# Altium PCB AudioDSP-1.0.PcbDoc
Units mil, origin at the board's own origin, x right, y up, seen from the top; angles counter-clockwise.
Board outline 3935 x 3935 mil, 4 copper layers (Top Layer, MLT, MLB, Bottom Layer), stack 23.756 mil thick; 126 components, 73 nets, 372 pads, 138 vias.
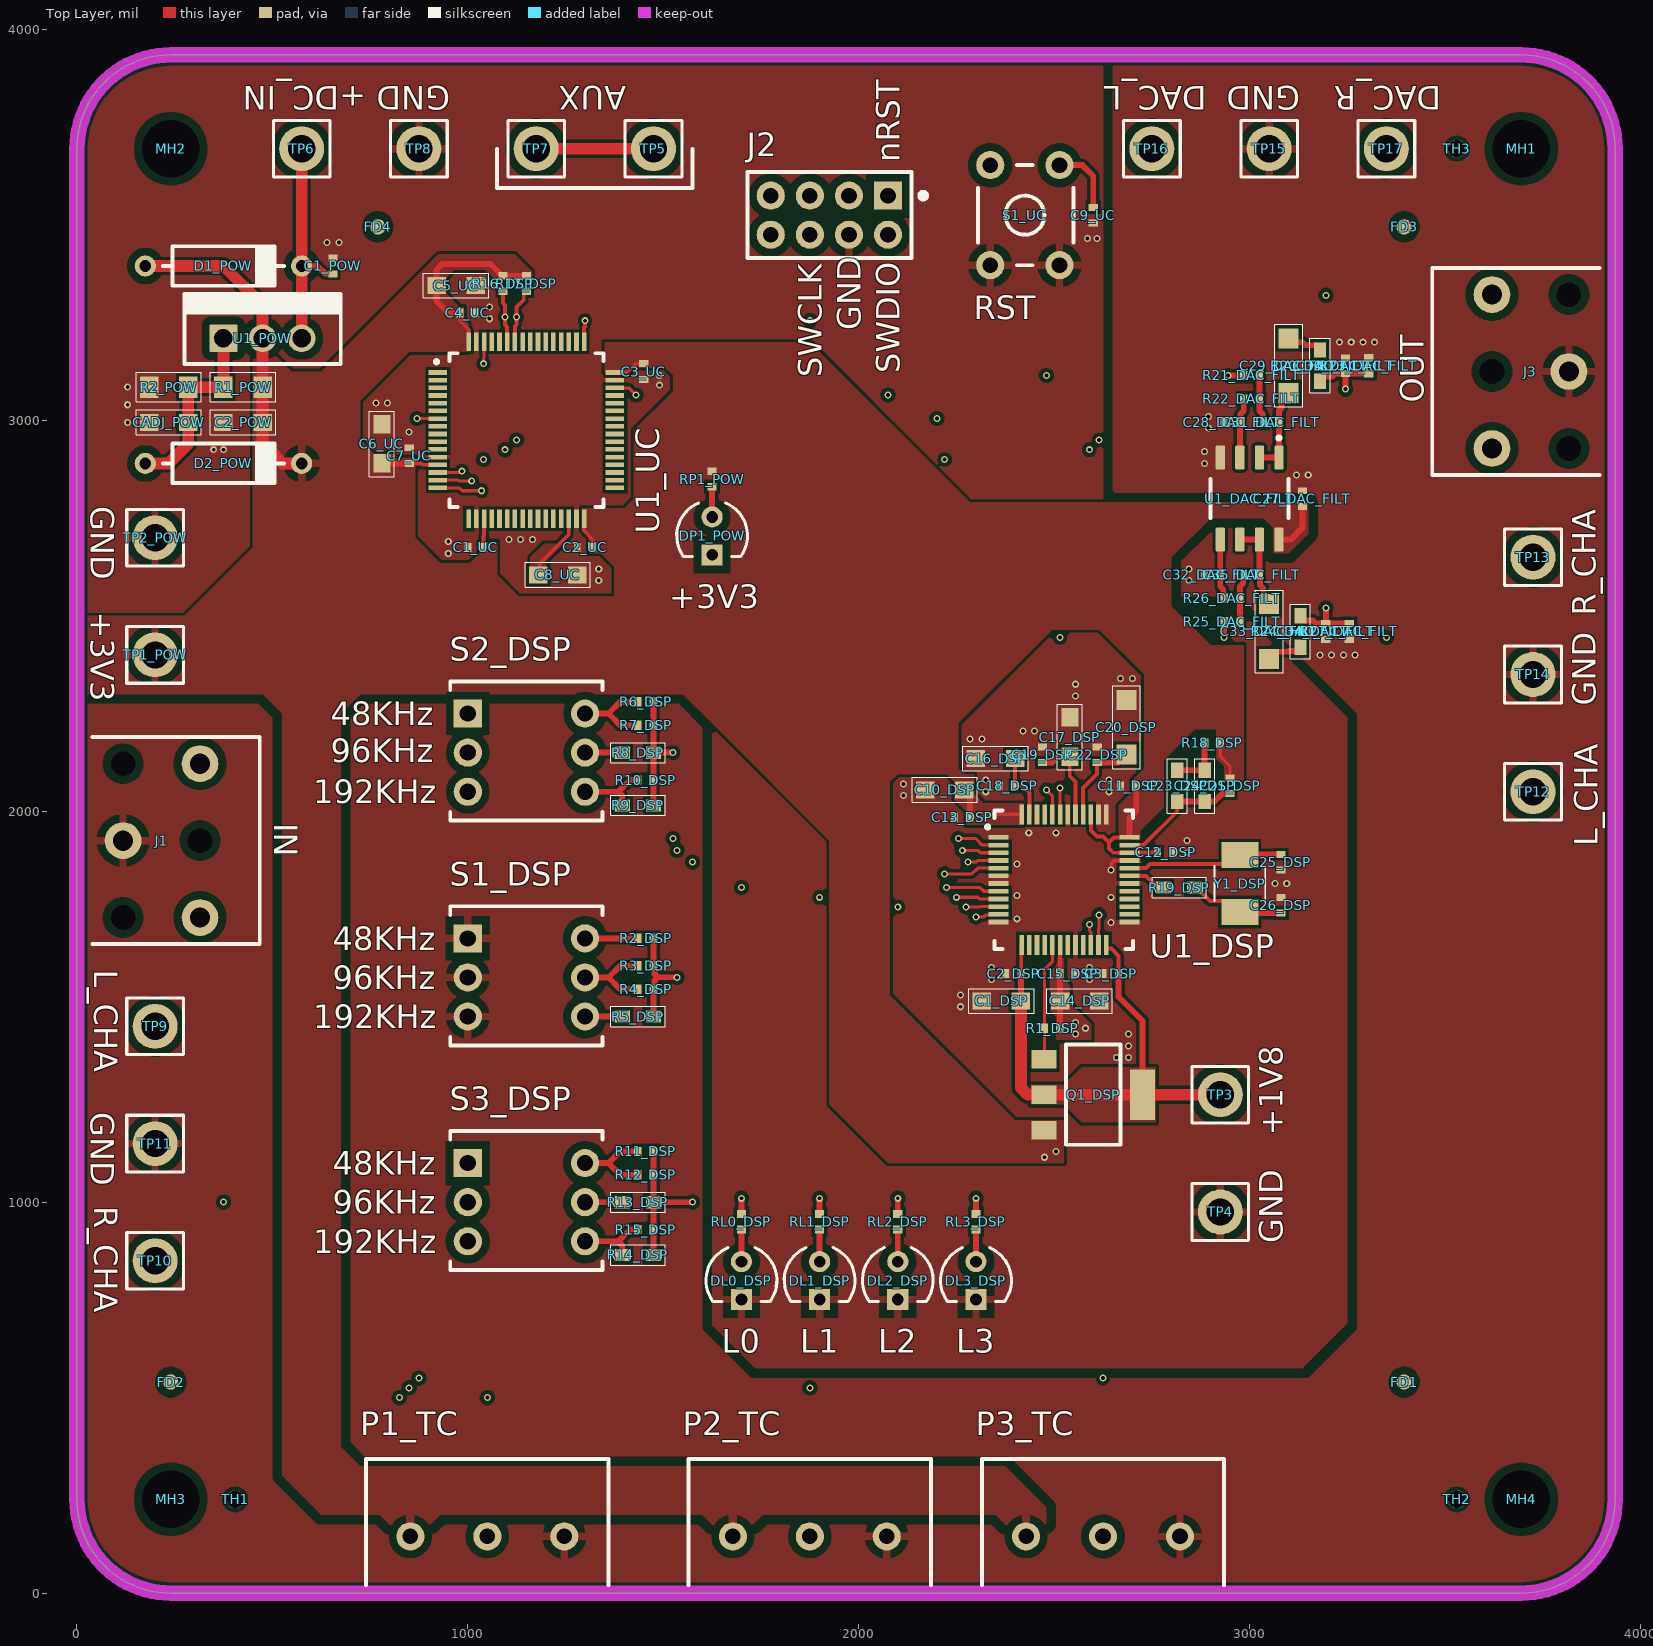
[diagram p0: Top Layer view]
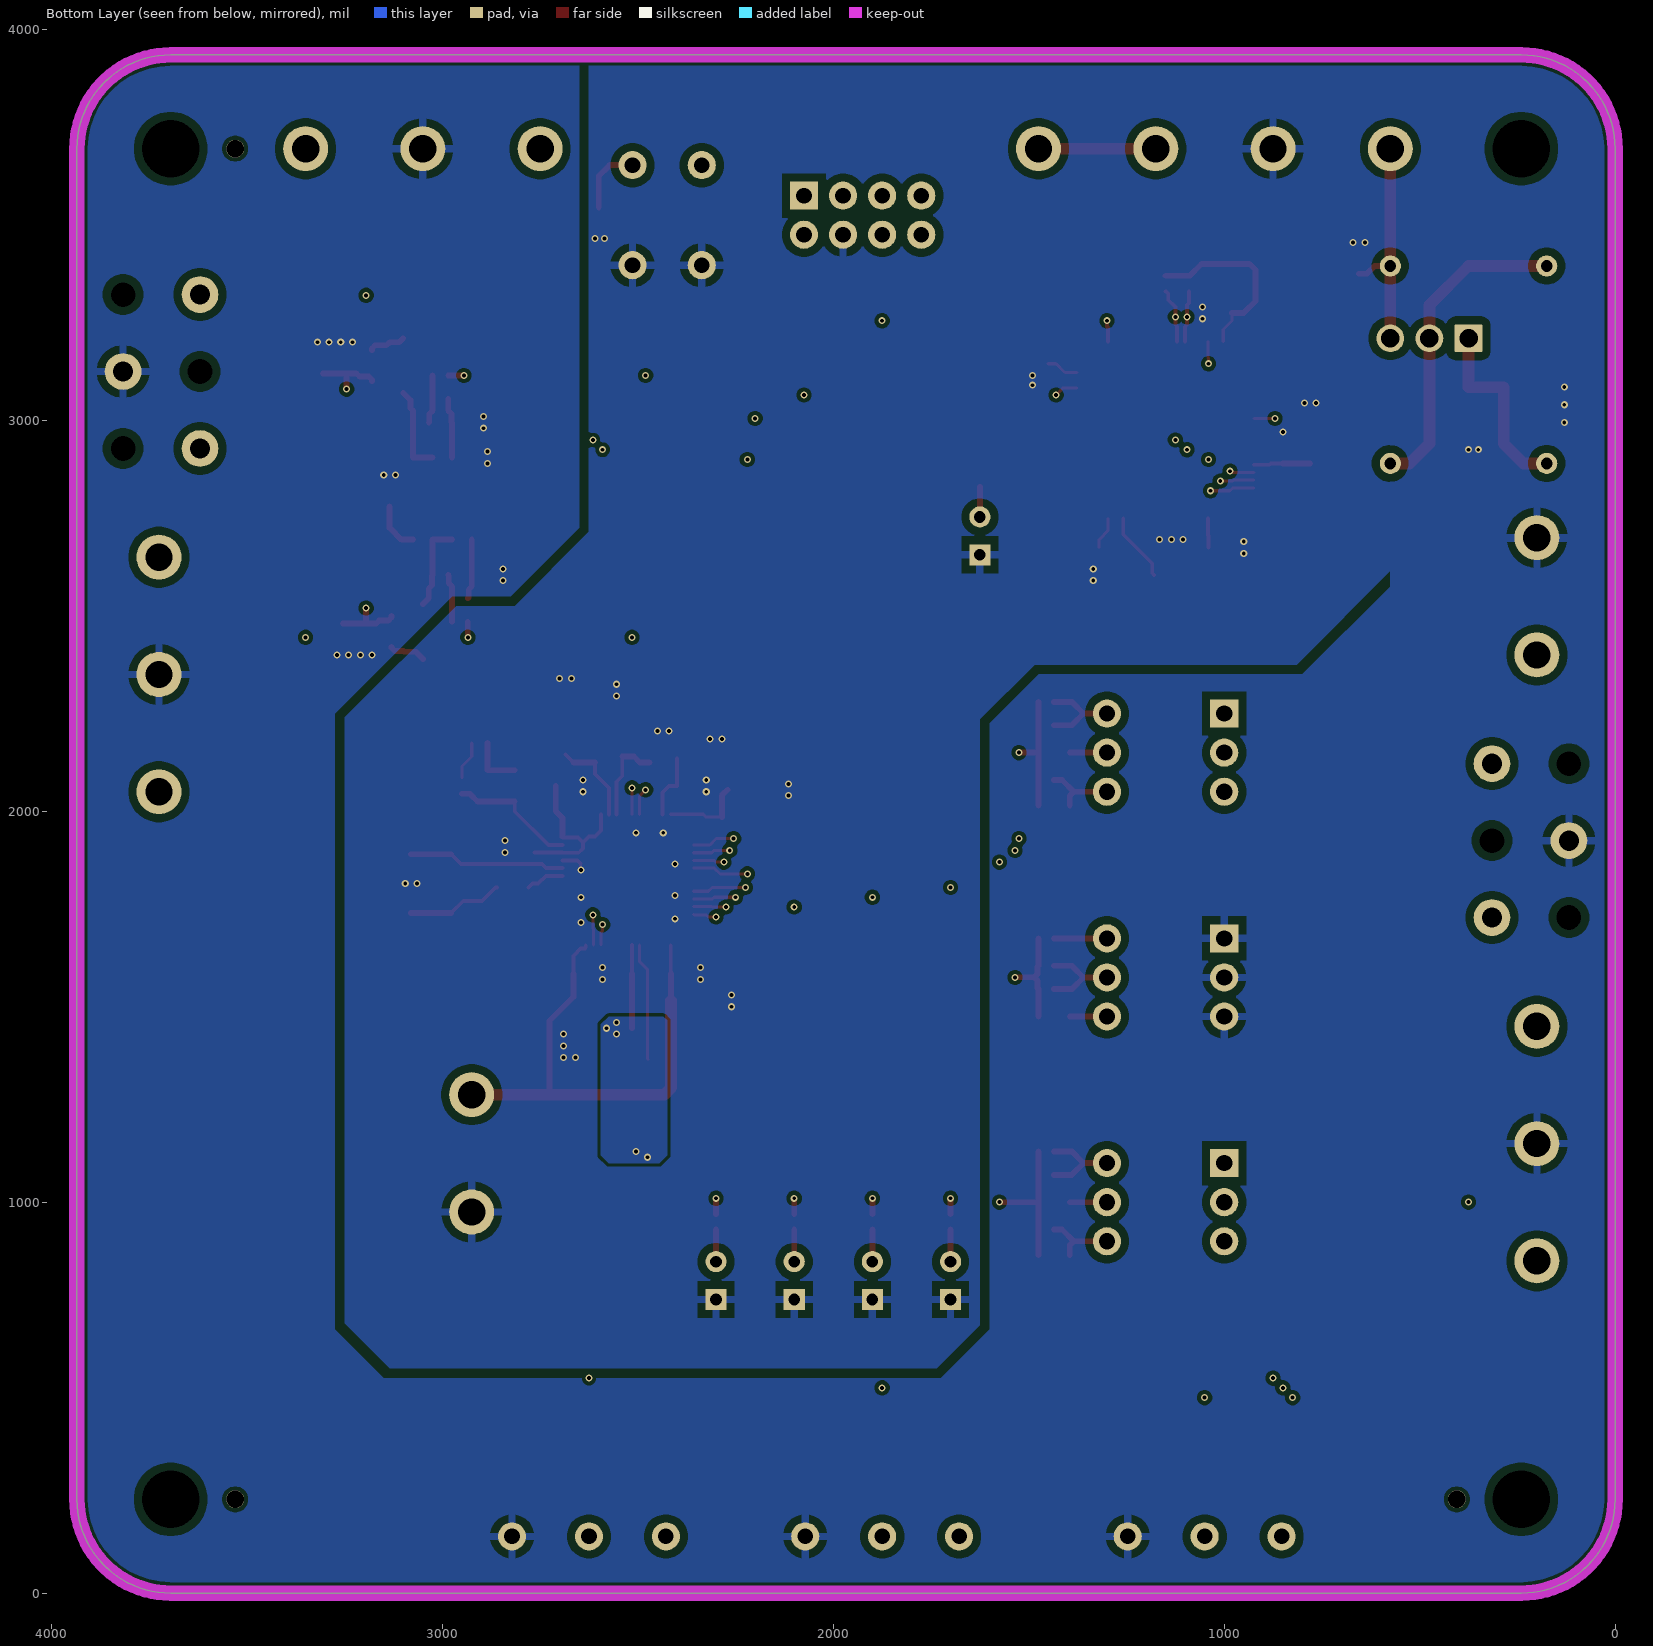
[diagram p1: Bottom Layer view, seen from below]
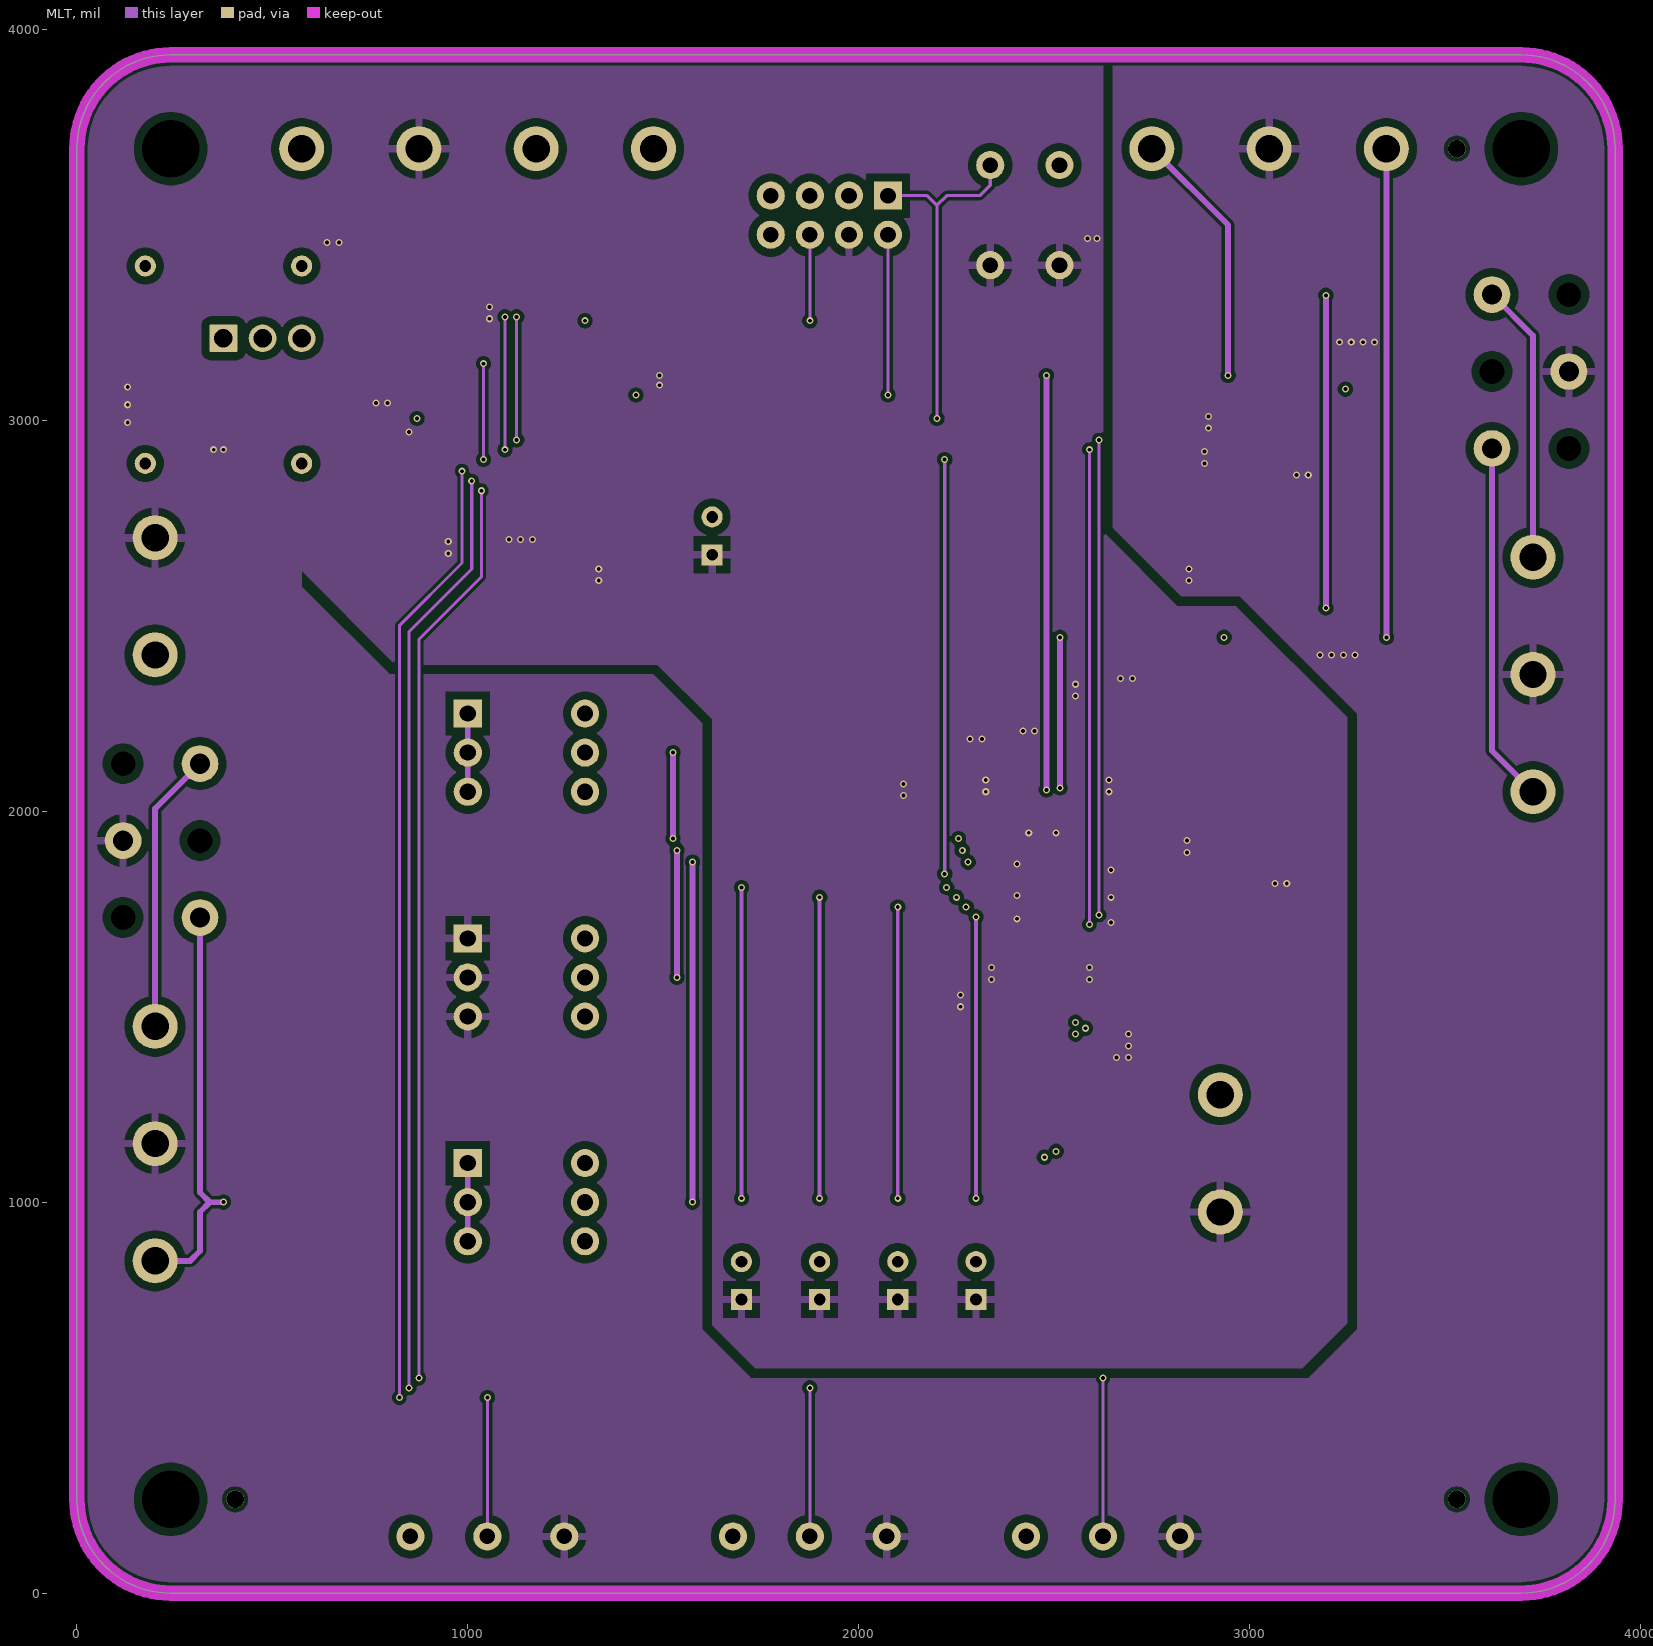
[diagram p2: MLT]
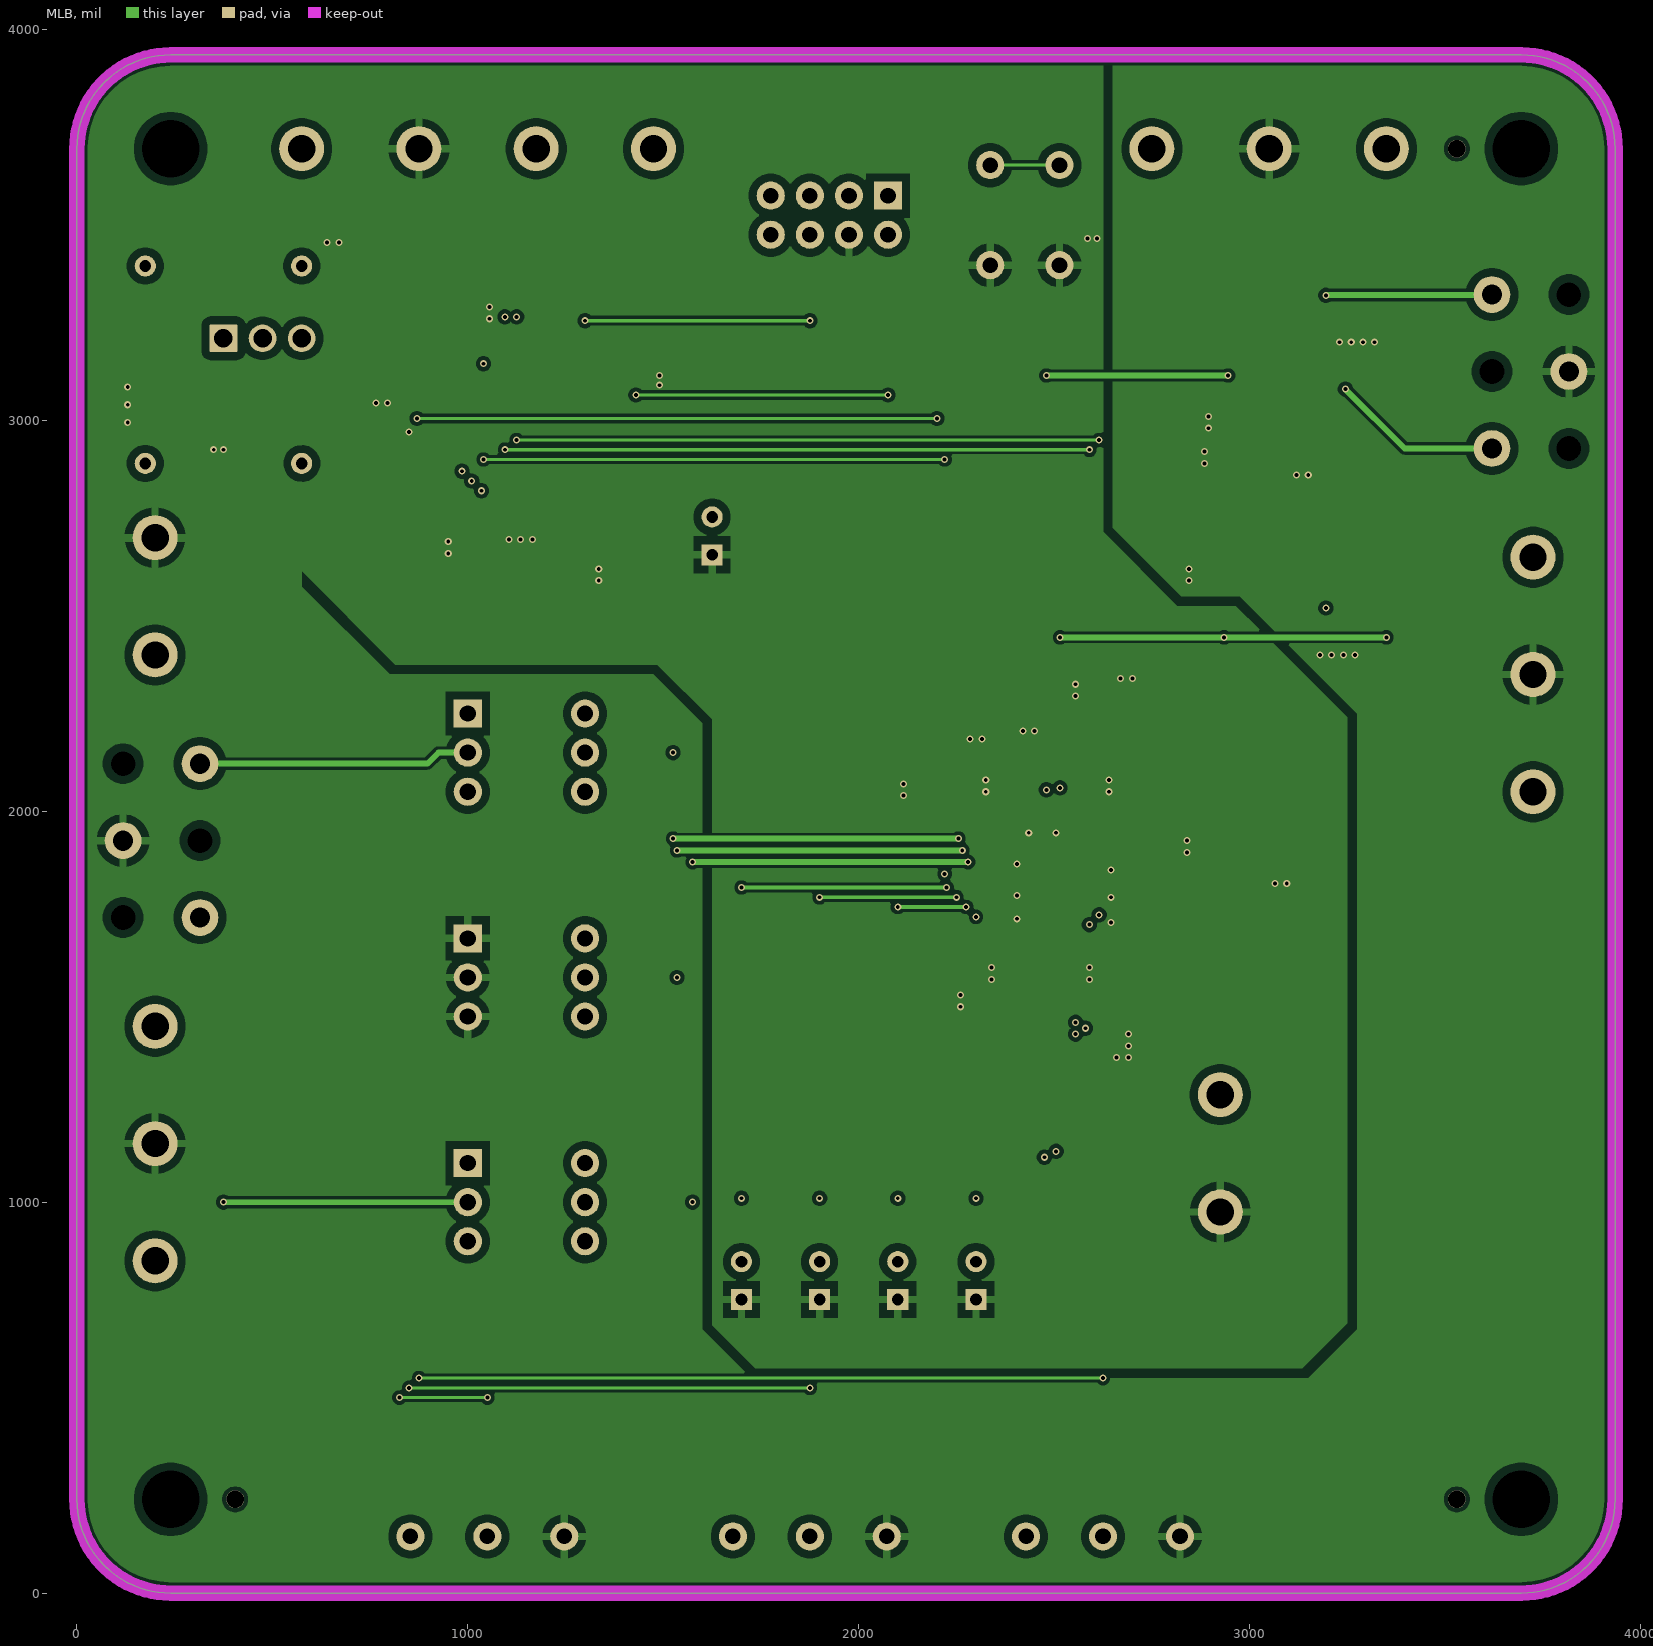
[diagram p3: MLB]
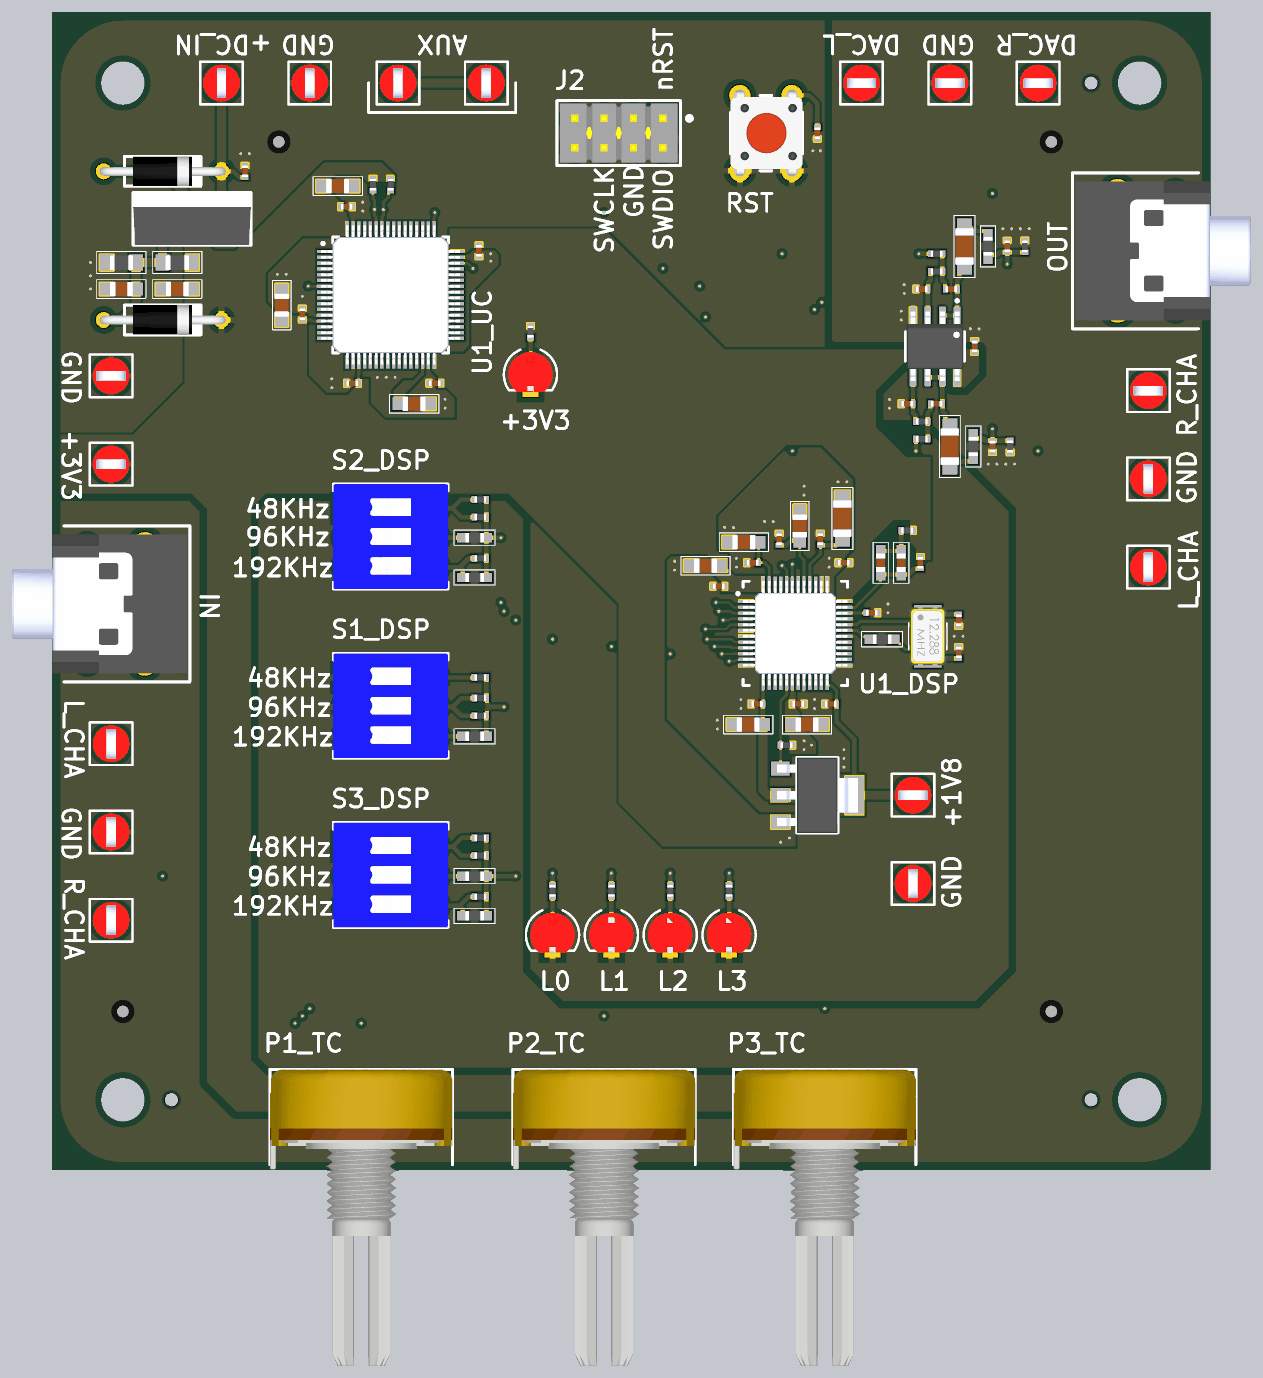
[diagram p4: 3D render of the assembled board from above, using the file's embedded part models]

## Layer stack, top to bottom
Top Solder: solder mask 0.4, Solder Resist, Dk 3.5
Top Layer: signal copper 1.4
Dielectric 2: prepreg 2.8, PP-006, Dk 4.1
MLT: signal copper 1.378
Dielectric 1: dielectric 12.6, FR-4, Dk 4.8
MLB: signal copper 1.378
Dielectric 3: prepreg 2.8, PP-006, Dk 4.1
Bottom Layer: signal copper 1.4
Bottom Solder: solder mask 0.4, Solder Resist, Dk 3.5

## Board outline
0,240 ccw(c240,240) 240,0 3695,0 ccw(c3695,240) 3935,240 3935,3695 ccw(c3695,3695) 3695,3935 240,3935 ccw(c240,3695) 0,3695

## Design rules (kind name [scope] priority, off if disabled: settings)
BoardOutlineClearance [All] p1: gap=7.87 ignorepadtopadclearanceinfootprint=FALSE except(15.75: Arc-SplitBarrior Arc-SplitContinuation Track-SplitBarrior Track-SplitContinuation SMDPad-SplitBarrior SMDPad-SplitContinuation THPad-SplitBarrior THPad-SplitContinuation Via-SplitBarrior Via-SplitContinuation Fill-SplitBarrior Fill-SplitContinuation Poly-SplitBarrior Poly-SplitContinuation Region-SplitBarrior Region-SplitContinuation Text-SplitBarrior Text-SplitContinuation)
Clearance Clearance_Poly_Fiducials [InPolygon vs InComponentClass('Fiducials')] p1: gap=20 ignorepadtopadclearanceinfootprint=FALSE
Clearance Clearance_Poly_Tooling [InPolygon vs InComponentClass('Tooling')] p2: gap=10 ignorepadtopadclearanceinfootprint=FALSE
Clearance Clearance_Poly_Top [InNamedPolygon('AGND-T') vs InNamedPolygon('+3V3-T')] p3: gap=25 ignorepadtopadclearanceinfootprint=FALSE
Clearance Clearance_Poly_THT [InPolygon vs InThruComponent] p4: gap=20 ignorepadtopadclearanceinfootprint=FALSE
Clearance Clearance_Poly_GRL [InPolygon vs IsVia] p5: gap=10 ignorepadtopadclearanceinfootprint=FALSE
Clearance Clearance_Poly [InPolygon vs InPolygon] p6: gap=8 ignorepadtopadclearanceinfootprint=FALSE
Clearance "Clearance Bottom Layer" [OnLayer('Bottom Layer')] p7: gap=8 ignorepadtopadclearanceinfootprint=TRUE except(10: Arc-Text Track-Text SMDPad-Text THPad-Text Via-Text Fill-Text Poly-Text Region-Text Text-Text)
Clearance "Clearance Top Layer" [OnLayer('Top Layer')] p8: gap=8 ignorepadtopadclearanceinfootprint=TRUE except(10: Arc-Text Track-Text SMDPad-Text THPad-Text Via-Text Fill-Text Poly-Text Region-Text Text-Text)
Clearance [All] p9: gap=7.87 ignorepadtopadclearanceinfootprint=FALSE except(3.5: Arc-Arc Arc-Track Arc-SMDPad Track-Track Track-SMDPad SMDPad-SMDPad; 5: Arc-Via Track-Via SMDPad-Via THPad-Via Via-Via; 10: Arc-Text Track-Text SMDPad-Text THPad-Text Via-Text Fill-Text Poly-Text Region-Text Text-Text)
ComponentClearance MH-Holes [InComponentClass('MountHole') vs InComponentClass('Tooling')] p1: gap=-1 collisioncheckmode=3 verticalgap=-1 showdistances=FALSE
ComponentClearance [All] p2: gap=10 collisioncheckmode=3 verticalgap=10 showdistances=FALSE
HoleSize [All] p1: absolutevalues=TRUE maxlimit=248.03 minlimit=7.87 maxpercent=80.000 minpercent=20.000
MinimumAnnularRing [All] p1: minimumring=3
MinimumSolderMaskSliver [All] p1: minsoldermaskwidth=3.94
PolygonConnect [All] p1: thpad.connectstyle=Relief thpad.reliefconductorwidth=20 thpad.reliefentries=4 thpad.polygonreliefangle="90 Angle" thpad.airgapwidth=20 smdpad.connectstyle=Direct smdpad.reliefconductorwidth=20 smdpad.reliefentries=4 smdpad.polygonreliefangle="90 Angle" smdpad.airgapwidth=10 via.connectstyle=Direct via.reliefconductorwidth=20 via.reliefentries=4 via.polygonreliefangle="90 Angle" via.airgapwidth=10
RoutingCorners [All] p1: cornerstyle=Round minsetback=100 maxsetback=100
RoutingVias [All] p1: holewidth=19.68 width=39.37 viastyle="Through Hole" minholewidth=7.87 minwidth=17.72 maxholewidth=39.37 maxwidth=78.74
SilkToSilkClearance [All] p1: silktosilkclearance=3.94
SilkToSolderMaskClearance [IsPad] p1: minsilkscreentomaskgap=3.94 clearancetoexposedcopper=TRUE
SolderMaskExpansion [All] p1: expansion=4 istentingtop=FALSE
Width [All] p1: maxlimit=100 minlimit=3.5 preferedwidth=15
24 further rules are at their usual default settings.

## Classes and differential pairs
component class MountHole: MH1 MH2 MH3 MH4
component class Tooling: TH1 TH2 TH3
component class Fiducials: FD1 FD2 FD3 FD4
component class UC: C1_UC C2_UC C3_UC C4_UC C5_UC C6_UC C7_UC C8_UC C9_UC S1_UC U1_UC
component class TC: P1_TC P2_TC P3_TC
component class POW: C1_POW C2_POW CADJ_POW D1_POW D2_POW DP1_POW R1_POW R2_POW RP1_POW TP1_POW TP2_POW U1_POW
component class OUT_CON: J3 TP12 TP13 TP14
component class IN_CON: J1 J2 TP5 TP6 TP7 TP8 TP9 TP10 TP11
component class DSP: C1_DSP C2_DSP C3_DSP C10_DSP C11_DSP C12_DSP C13_DSP C14_DSP C15_DSP C16_DSP C17_DSP C18_DSP C19_DSP C20_DSP C21_DSP C22_DSP C23_DSP C24_DSP C25_DSP C26_DSP DL0_DSP DL1_DSP DL2_DSP DL3_DSP Q1_DSP R1_DSP R2_DSP R3_DSP R4_DSP R5_DSP R6_DSP R7_DSP R8_DSP R9_DSP R10_DSP R11_DSP R12_DSP R13_DSP R14_DSP R15_DSP R16_DSP R17_DSP R18_DSP R19_DSP RL0_DSP RL1_DSP RL2_DSP RL3_DSP S1_DSP S2_DSP S3_DSP TP3 TP4 U1_DSP Y1_DSP
component class DAC_FILT: C27_DAC_FILT C28_DAC_FILT C29_DAC_FILT C30_DAC_FILT C31_DAC_FILT C32_DAC_FILT C33_DAC_FILT C34_DAC_FILT C35_DAC_FILT R20_DAC_FILT R21_DAC_FILT R22_DAC_FILT R23_DAC_FILT R24_DAC_FILT R25_DAC_FILT R26_DAC_FILT R27_DAC_FILT TP15 TP16 TP17 U1_DAC_FILT
component class AudioDSP-1.0_top: FD1 FD2 FD3 FD4 MH1 MH2 MH3 MH4 TH1 TH2 TH3

## Components (designator, comment, footprint, x,y, rotation, side; value= is the part's Value field where it differs from the comment)
C1_DSP "10uF" 0805-CAP-TDK 2365,1515 r180 top (schematic designator C1)
C1_POW "0.1uF" 0402-CAP-TDK 655,3395 r270 top (schematic designator C1)
C1_UC "0.1uF" 0402-CAP-TDK 1020,2675 r0 top (schematic designator C1)
C2_DSP "0.1uF" 0402-CAP-TDK 2395,1585 r180 top (schematic designator C2)
C2_POW "1uF" 0805-CAP-TDK 425,2995 r0 top (schematic designator C2)
C2_UC "0.1uF" 0402-CAP-TDK 1300,2675 r0 top (schematic designator C2)
C3_DSP "0.1uF" 0402-CAP-TDK 2645,1585 r180 top (schematic designator C3)
C3_UC "0.1uF" 0402-CAP-TDK 1450,3125 r90 top (schematic designator C3)
C4_UC "0.1uF" 0402-CAP-TDK 1000,3275 r180 top (schematic designator C4)
C5_UC "4.7uF" 0805-CAP-TDK 970,3345 r180 top (schematic designator C5)
C6_UC "1uF" 0805-CAP-TDK 780,2940 r270 top (schematic designator C6)
C7_UC "0.1uF" 0402-CAP-TDK 850,2910 r270 top (schematic designator C7)
C8_UC "4.7uF" 0805-CAP-TDK 1230,2605 r180 top (schematic designator C8)
C9_UC "0.1uF" 0402-CAP-TDK 2600,3525 r90 top (schematic designator C9)
C10_DSP "10uF" 0805-CAP-TDK 2220,2055 r0 top (schematic designator C10)
C11_DSP "0.1uF" 0402-CAP-TDK 2690,2065 r0 top (schematic designator C11)
C12_DSP "0.1uF" 0402-CAP-TDK 2785,1895 r180 top (schematic designator C12)
C13_DSP "0.1uF" 0402-CAP-TDK 2265,1985 r0 top (schematic designator C13)
C14_DSP "10uF" 0805-CAP-TDK 2565,1515 r180 top (schematic designator C14)
C15_DSP "0.1uF" 0402-CAP-TDK 2535,1585 r180 top (schematic designator C15)
C16_DSP "10uF" 0805-CAP-TDK 2350,2135 r0 top (schematic designator C16)
C17_DSP "10uF" 0805-CAP-TDK 2540,2190 r90 top (schematic designator C17)
C18_DSP "0.1uF" 0402-CAP-TDK 2380,2065 r0 top (schematic designator C18)
C19_DSP "0.1uF" 0402-CAP-TDK 2470,2145 r90 top (schematic designator C19)
C20_DSP "47uF" 1206-CAP-TDK 2685,2215 r90 top (schematic designator C20)
C21_DSP "3.3nF" 0402-CAP-TDK 2950,2065 r270 top (schematic designator C21)
C22_DSP "0.1uF" 0402-CAP-TDK 2610,2145 r90 top (schematic designator C22)
C23_DSP "33nF" 0603-CAP-TDK 2815,2065 r270 top (schematic designator C23)
C24_DSP "22nF" 0603-CAP-TDK 2885,2065 r270 top (schematic designator C24)
C25_DSP "22pF" 0402-CAP-TDK 3080,1870 r90 top (schematic designator C25)
C26_DSP "22pF" 0402-CAP-TDK 3080,1760 r270 top (schematic designator C26)
C27_DAC_FILT "0.1uF" 0402-CAP-TDK 3135,2800 r270 top (schematic designator C27)
C28_DAC_FILT "150pF" 0402-CAP-TDK 2955,2995 r0 top (schematic designator C28)
C29_DAC_FILT "47uF" 1206-CAP-TDK 3100,3140 r270 top (schematic designator C29)
C30_DAC_FILT "3.3nF" 0402-CAP-TDK 3245,3140 r90 top (schematic designator C30)
C31_DAC_FILT "470pF" 0402-CAP-TDK 3055,2995 r180 top (schematic designator C31)
C32_DAC_FILT "150pF" 0402-CAP-TDK 2905,2605 r0 top (schematic designator C32)
C33_DAC_FILT "47uF" 1206-CAP-TDK 3050,2460 r90 top (schematic designator C33)
C34_DAC_FILT "3.3nF" 0402-CAP-TDK 3195,2460 r270 top (schematic designator C34)
C35_DAC_FILT "470pF" 0402-CAP-TDK 3005,2605 r180 top (schematic designator C35)
CADJ_POW "10uF" 0805-CAP-TDK 235,2995 r0 top (schematic designator CADJ)
D1_POW "1N4007" DO41 375,3395 r0 top (schematic designator D1)
D2_POW "1N4007" DO41 375,2890 r0 top (schematic designator D2)
DL0_DSP "LED" LED-3MM 1700,800 r270 top (schematic designator DL0)
DL1_DSP "LED" LED-3MM 1900,800 r270 top (schematic designator DL1)
DL2_DSP "LED" LED-3MM 2100,800 r270 top (schematic designator DL2)
DL3_DSP "LED" LED-3MM 2300,800 r270 top (schematic designator DL3)
DP1_POW "LED" LED-3MM 1625,2705 r270 top (schematic designator DP1)
FD1 "Fiducial" Fiducial 3395,540 r0 top
FD2 "Fiducial" Fiducial 240,540 r90 top
FD3 "Fiducial" Fiducial 3395,3495 r90 top
FD4 "Fiducial" Fiducial 770,3495 r90 top
J1 "STX-3200-3NB" JACK-3.5-3POS 315,1925 r0 top locked
J2 "CON4X2" SIP4X2 1925,3525 r180 top
J3 "STX-3200-3NB" JACK-3.5-3POS 3620,3125 r180 top locked
MH1 "MH-3.75MM" MH-3.75mm-NP 3695,3695 r0 top locked
MH2 "MH-3.75MM" MH-3.75mm-NP 240,3695 r0 top locked
MH3 "MH-3.75MM" MH-3.75mm-NP 240,240 r0 top locked
MH4 "MH-3.75MM" MH-3.75mm-NP 3695,240 r0 top locked
P1_TC "10K" POT-THT 1050,145 r0 top locked (schematic designator P1)
P2_TC "10K" POT-THT 1875,145 r0 top locked (schematic designator P2)
P3_TC "10K" POT-THT 2625,145 r0 top locked (schematic designator P3)
Q1_DSP "FZT953" SOT223-DN 2600,1275 r270 top (schematic designator Q1)
R1_DSP "1K" 0402-RES-PANASONIC 2495,1445 r0 top (schematic designator R1)
R1_POW "240" 0805-RES-PANASONIC 425,3085 r0 top (schematic designator R1)
R2_DSP "18K" 0402-RES-PANASONIC 1455,1675 r0 top (schematic designator R2)
R2_POW "390" 0805-RES-PANASONIC 235,3085 r0 top (schematic designator R2)
R3_DSP "8K2" 0402-RES-PANASONIC 1455,1605 r0 top (schematic designator R3)
R4_DSP "330K" 0402-RES-PANASONIC 1455,1545 r0 top (schematic designator R4)
R5_DSP "3K" 0603-RES-PANASONIC 1435,1475 r0 top (schematic designator R5)
R6_DSP "330K" 0402-RES-PANASONIC 1455,2280 r0 top (schematic designator R6)
R7_DSP "8K2" 0402-RES-PANASONIC 1455,2220 r0 top (schematic designator R7)
R8_DSP "3K" 0603-RES-PANASONIC 1435,2150 r0 top (schematic designator R8)
R9_DSP "560" 0603-RES-PANASONIC 1435,2015 r0 top (schematic designator R9)
R10_DSP "4K7" 0402-RES-PANASONIC 1455,2080 r0 top (schematic designator R10)
R11_DSP "330K" 0402-RES-PANASONIC 1455,1130 r0 top (schematic designator R11)
R12_DSP "8K2" 0402-RES-PANASONIC 1455,1070 r0 top (schematic designator R12)
R13_DSP "3K" 0603-RES-PANASONIC 1435,1000 r0 top (schematic designator R13)
R14_DSP "560" 0603-RES-PANASONIC 1435,865 r0 top (schematic designator R14)
R15_DSP "4K7" 0402-RES-PANASONIC 1455,930 r0 top (schematic designator R15)
R16_DSP "2K2" 0402-RES-PANASONIC 1090,3350 r90 top (schematic designator R16)
R17_DSP "2K2" 0402-RES-PANASONIC 1150,3350 r90 top (schematic designator R17)
R18_DSP "470" 0402-RES-PANASONIC 2905,2175 r0 top (schematic designator R18)
R19_DSP "100" 0603-RES-PANASONIC 2820,1805 r0 top (schematic designator R19)
R20_DAC_FILT "560" 0603-RES-PANASONIC 3180,3140 r270 top (schematic designator R20)
R21_DAC_FILT "4K7" 0402-RES-PANASONIC 3005,3115 r0 top (schematic designator R21)
R22_DAC_FILT "4K7" 0402-RES-PANASONIC 3005,3055 r180 top (schematic designator R22)
R23_DAC_FILT "49K9" 0402-RES-PANASONIC 3305,3140 r270 top (schematic designator R23)
R24_DAC_FILT "560" 0603-RES-PANASONIC 3130,2460 r90 top (schematic designator R24)
R25_DAC_FILT "4K7" 0402-RES-PANASONIC 2955,2485 r0 top (schematic designator R25)
R26_DAC_FILT "4K7" 0402-RES-PANASONIC 2955,2545 r180 top (schematic designator R26)
R27_DAC_FILT "49K9" 0402-RES-PANASONIC 3255,2460 r90 top (schematic designator R27)
RL0_DSP "680" 0402-RES-PANASONIC 1700,950 r90 top (schematic designator RL0)
RL1_DSP "680" 0402-RES-PANASONIC 1900,950 r90 top (schematic designator RL1)
RL2_DSP "680" 0402-RES-PANASONIC 2100,950 r90 top (schematic designator RL2)
RL3_DSP "680" 0402-RES-PANASONIC 2300,950 r90 top (schematic designator RL3)
RP1_POW "680" 0402-RES-PANASONIC 1625,2850 r270 top (schematic designator RP1)
S1_DSP "ADC_RES" DIP-SW-3 1150,1575 r270 top (schematic designator S1)
S1_UC "RST" TACT-SWITCH 2425,3525 r0 top (schematic designator S1)
S2_DSP "ADC0_RES" DIP-SW-3 1150,2150 r270 top (schematic designator S2)
S3_DSP "ADC1_RES" DIP-SW-3 1150,1000 r270 top (schematic designator S3)
TH1 "ToolingHole" TOOLING-HOLE 405,240 r90 top
TH2 "ToolingHole" TOOLING-HOLE 3530,240 r90 top
TH3 "ToolingHole" TOOLING-HOLE 3530,3695 r90 top
TP1_POW "+3V3" 534-5280 200,2400 r270 top locked (schematic designator TP1)
TP2_POW "GND" 534-5280 200,2700 r90 top locked (schematic designator TP2)
TP3 "+1V8" 534-5280 2925,1275 r270 top locked
TP4 "GND" 534-5280 2925,975 r0 top locked
TP5 "AUX" 534-5280 1475,3695 r0 top locked
TP6 "+DC_IN" 534-5280 575,3695 r0 top locked
TP7 "AUX" 534-5280 1175,3695 r0 top locked
TP8 "GND" 534-5280 875,3695 r0 top locked
TP9 "L_CHA" 534-5280 200,1450 r180 top locked
TP10 "R_CHA" 534-5280 200,850 r0 top locked
TP11 "GND" 534-5280 200,1150 r0 top locked
TP12 "L_CHA" 534-5280 3725,2050 r0 top locked
TP13 "R_CHA" 534-5280 3725,2650 r90 top locked
TP14 "GND" 534-5280 3725,2350 r0 top locked
TP15 "GND" 534-5280 3050,3695 r270 top locked
TP16 "IN1" 534-5280 2750,3695 r90 top locked
TP17 "IN2" 534-5280 3350,3695 r90 top locked
U1_DAC_FILT "OPA1688IDR" TI-SOIC-8 3000,2800 r270 top (schematic designator U1)
U1_DSP "ADAU1701JSTZ" "LQFP-48 - ST-48" 2525,1825 r0 top (schematic designator U1)
U1_POW "LM317KCS" "TO-220 - KCS0003B" 475,3210 r0 top (schematic designator U1)
U1_UC "STM32F401RxT6" LQFP-64 1150,2975 r270 top (schematic designator U1)
Y1_DSP "12.288MHz" SMD5032 2975,1815 r270 top (schematic designator Y1)

## Footprints (in the part's own frame and the unit in brackets; to place one, negate y for a bottom-side part, rotate by r counter-clockwise, add the part's x,y. Pads: shape width x height; smd on the part's side, far side on the other; paste and mask are expansions set on the pad)
0402-CAP-TDK [mm]
  rect 0.45x0.6 smd: 1(-0.508,0) 2(0.508,0)
  body extent -0.5,-0.25 0.5,0.25, height 0.55
0402-RES-PANASONIC [mm]
  rect 0.5x0.6 smd: 1(-0.508,0) 2(0.508,0)
  body extent -0.5,-0.25 0.5,0.25, height 0.35
534-5280 [mil]
  round 115 hole 70: 1(0,0)
  silkscreen extent -73,-73 73,73, body extent -63,-62 63,62, height 320
0603-CAP-TDK [mm]
  rect 1x0.8 smd: 1(-1.016,0) 2(1.016,0)
  silkscreen extent -1.77,-0.65 1.77,0.65, body extent -0.8,-0.4 0.8,0.4, height 0.9
0603-RES-PANASONIC [mm]
  rect 1x0.8 smd: 1(-1.016,0) 2(1.016,0)
  silkscreen extent -1.77,-0.65 1.77,0.65, body extent -0.8,-0.4 0.8,0.4, height 0.45
0805-CAP-TDK [mm]
  rect 1.2x1.1 smd: 1(-1.27,0) 2(1.27,0)
  silkscreen extent -2.12,-0.8 2.12,0.8, body extent -1,-0.63 1,0.63, height 1.45
0805-RES-PANASONIC [mm]
  rect 1.2x1.4 smd: 1(-1.27,0) 2(1.27,0)
  silkscreen extent -2.12,-0.95 2.12,0.95, body extent -1,-0.63 1,0.63, height 0.6
1206-CAP-TDK [mm]
  rect 1.3x1.3 smd: 1(-1.778,0) 2(1.778,0)
  silkscreen extent -2.68,-0.9 2.68,0.9, body extent -1.6,-0.8 1.6,0.8, height 1.8
DIP-SW-3 [mil]
  rect 72x72 hole 41.34: 1(-100,-150)
  round 72 hole 41.34: 2(-100,150) 3(0,-150) 4(0,150) 5(100,-150) 6(100,150)
  silkscreen extent -182,-195 174,195, body extent -182,-195 174,195, height 264
DO41 [mil]
  round 54 hole 30: 1(-200,0) 2(200,0)
  silkscreen extent -155,-50 155,50, body extent -215,-50 215,50, height 80
Fiducial [mm]
  round 1 smd mask+0.5: ""(0,0)
JACK-3.5-3POS [mil]
  round 94 hole 52: 1S(-196.85,0) 2R(0,196.85) 5T(0,-196.85)
  round 45 hole 63 unplated: ""(-196.85,-196.85) ""(-196.85,196.85) ""(0,0)
  silkscreen extent -275,-265 153,265, body extent -452,-236 143,236, height 432
LED-3MM [mil]
  round 54 hole 30: 1(-48,0)
  rect 54x54 hole 30: 2(49,0)
  silkscreen extent -84,-90 54,90, body extent -76,-76 62,76, height 271
"LQFP-48 - ST-48" [mm]
  rect 1.3x0.3 smd mask+0.05: 1(-4.25,2.75) 2(-4.25,2.25) 3(-4.25,1.75) 4(-4.25,1.25) 5(-4.25,0.75) 6(-4.25,0.25) 7(-4.25,-0.25) 8(-4.25,-0.75) 9(-4.25,-1.25) 10(-4.25,-1.75) 11(-4.25,-2.25) 12(-4.25,-2.75) 25(4.25,-2.75) 26(4.25,-2.25) 27(4.25,-1.75) 28(4.25,-1.25) 29(4.25,-0.75) 30(4.25,-0.25) 31(4.25,0.25) 32(4.25,0.75) 33(4.25,1.25) 34(4.25,1.75) 35(4.25,2.25) 36(4.25,2.75)
  rect 0.3x1.3 smd mask+0.05: 13(-2.75,-4.25) 14(-2.25,-4.25) 15(-1.75,-4.25) 16(-1.25,-4.25) 17(-0.75,-4.25) 18(-0.25,-4.25) 19(0.25,-4.25) 20(0.75,-4.25) 21(1.25,-4.25) 22(1.75,-4.25) 23(2.25,-4.25) 24(2.75,-4.25) 37(2.75,4.25) 38(2.25,4.25) 39(1.75,4.25) 40(1.25,4.25) 41(0.75,4.25) 42(0.25,4.25) 43(-0.25,4.25) 44(-0.75,4.25) 45(-1.25,4.25) 46(-1.75,4.25) 47(-2.25,4.25) 48(-2.75,4.25)
  silkscreen extent -5.05,-4.5 4.5,4.5, body extent -4.5,-4.5 4.5,4.5, height 1.63
LQFP-64 [mm]
  rect 0.3x1.2 smd mask+0.05: 1(-3.75,-5.75) 2(-3.25,-5.75) 3(-2.75,-5.75) 4(-2.25,-5.75) 5(-1.75,-5.75) 6(-1.25,-5.75) 7(-0.75,-5.75) 8(-0.25,-5.75) 9(0.25,-5.75) 10(0.75,-5.75) 11(1.25,-5.75) 12(1.75,-5.75) 13(2.25,-5.75) 14(2.75,-5.75) 15(3.25,-5.75) 16(3.75,-5.75) 33(3.75,5.75) 34(3.25,5.75) 35(2.75,5.75) 36(2.25,5.75) 37(1.75,5.75) 38(1.25,5.75) 39(0.75,5.75) 40(0.25,5.75) 41(-0.25,5.75) 42(-0.75,5.75) 43(-1.25,5.75) 44(-1.75,5.75) 45(-2.25,5.75) 46(-2.75,5.75) 47(-3.25,5.75) 48(-3.75,5.75)
  rect 1.2x0.3 smd mask+0.05: 17(5.75,-3.75) 18(5.75,-3.25) 19(5.75,-2.75) 20(5.75,-2.25) 21(5.75,-1.75) 22(5.75,-1.25) 23(5.75,-0.75) 24(5.75,-0.25) 25(5.75,0.25) 26(5.75,0.75) 27(5.75,1.25) 28(5.75,1.75) 29(5.75,2.25) 30(5.75,2.75) 31(5.75,3.25) 32(5.75,3.75) 49(-5.75,3.75) 50(-5.75,3.25) 51(-5.75,2.75) 52(-5.75,2.25) 53(-5.75,1.75) 54(-5.75,1.25) 55(-5.75,0.75) 56(-5.75,0.25) 57(-5.75,-0.25) 58(-5.75,-0.75) 59(-5.75,-1.25) 60(-5.75,-1.75) 61(-5.75,-2.25) 62(-5.75,-2.75) 63(-5.75,-3.25) 64(-5.75,-3.75)
  silkscreen extent -5,-5.94 5,5, body extent -6,-6 6,6, height 1.62
MH-3.75mm-NP [mm]
  round 3 hole 3.75 unplated: 1(0,0)
POT-THT [mil]
  round 72 hole 40: 1(-196.85,0) 2(0,0) 3(196.85,0)
  silkscreen extent -310,-125 310,198, body extent -310,-808 310,198, height 793
SIP4X2 [mil]
  rect 72x72 hole 40: 1(-150,-50)
  round 72 hole 40: 2(-150,50) 3(-50,-50) 4(-50,50) 5(50,-50) 6(50,50) 7(150,-50) 8(150,50)
  silkscreen extent -250,-110 210,110, body extent -200,-100 200,100, height 330
SMD5032 [mm]
  rect 1.7x2.4 smd: 1(-1.85,0) 2(1.85,0)
  silkscreen extent -1.14,-1.65 1.14,1.65, body extent -2.5,-1.6 2.5,1.6, height 1.2
SOT223-DN [mm]
  rect 1.2x1.6 smd: B(-2.3,-3.2) C(0,-3.2) E(2.3,-3.2)
  rect 3.3x1.6 smd: C(0,3.2)
  silkscreen extent -3.25,-1.78 3.25,1.78, body extent -3.25,-3.5 3.25,3.5, height 1.65
TACT-SWITCH [mil]
  round 72 hole 40: 1(-88.58,-127.95) 2(88.58,-127.95) 3(-88.58,127.95) 4(88.58,127.95)
  silkscreen extent -120,-128 125,128, body extent -120,-156 124,156, height 276
TI-SOIC-8 [mm]
  rrect25% 1.55x0.6 smd mask+0.07: 1(-2.667,1.905) 2(-2.667,0.635) 3(-2.667,-0.635) 4(-2.667,-1.905) 5(2.667,-1.905) 6(2.667,-0.635) 7(2.667,0.635) 8(2.667,1.905)
  silkscreen extent -4.04,-2.54 1.27,2.54, body extent -3,-2.45 3,2.45, height 1.75
"TO-220 - KCS0003B" [mm]
  rrect6% 1.8x1.8 hole 1.2 mask+0.07: 1(-2.54,0)
  round 1.8 hole 1.2 mask+0.07: 2(0,0) 3(2.54,0)
  silkscreen extent -5.08,-1.68 5.08,2.88, body extent -5.08,-1.68 5.08,2.88, height 19.65
TOOLING-HOLE [mil]
  round 45.35 hole 45.35 unplated mask+2.91: ""(0,0)

## Part data
C1_DSP C10_DSP C14_DSP C16_DSP C17_DSP CADJ_POW: library part CAP-SMD, JLCPart=C15850
C1_POW C1_UC C2_DSP C2_UC C3_DSP C3_UC C4_UC C7_UC C9_UC C11_DSP C12_DSP C13_DSP C15_DSP C18_DSP C19_DSP C22_DSP C27_DAC_FILT: library part CAP-SMD, JLCPart=C307331
C2_POW C6_UC: library part CAP-SMD, JLCPart=C28323
C5_UC C8_UC: library part CAP-SMD, JLCPart=C1779
C20_DSP C29_DAC_FILT C33_DAC_FILT: library part CAP-SMD, JLCPart=C96123
C21_DSP C30_DAC_FILT C34_DAC_FILT: library part CAP-SMD, JLCPart=C26404
C23_DSP: library part CAP-SMD, JLCPart=C21117
C24_DSP: library part CAP-SMD, JLCPart=C21122
C25_DSP C26_DSP: library part CAP-SMD, JLCPart=C1555
C28_DAC_FILT C32_DAC_FILT: library part CAP-SMD, JLCPart=C1527
C31_DAC_FILT C35_DAC_FILT: library part CAP-SMD, JLCPart=C1537
D1_POW D2_POW: library part "DIODE RECTIFIER", "Diode Rectifier"
P1_TC P2_TC P3_TC: library part POT-THT
Q1_DSP: JLCPart=C499616
R1_DSP: library part RES-SMD, JLCPart=C11702
R1_POW: library part RES-SMD, JLCPart=C17572
R2_DSP: library part RES-SMD, JLCPart=C25762
R2_POW: library part RES-SMD, JLCPart=C17655
R3_DSP R7_DSP R12_DSP: library part RES-SMD, JLCPart=C25924
R4_DSP R6_DSP R11_DSP: library part RES-SMD, JLCPart=C25778
R5_DSP R8_DSP R13_DSP: library part RES-SMD, JLCPart=C4211
R9_DSP R14_DSP R20_DAC_FILT R24_DAC_FILT: library part RES-SMD, JLCPart=C23204
R10_DSP R15_DSP R21_DAC_FILT R22_DAC_FILT R25_DAC_FILT R26_DAC_FILT: library part RES-SMD, JLCPart=C25900
R16_DSP R17_DSP: library part RES-SMD, JLCPart=C25879
R18_DSP: library part RES-SMD, JLCPart=C25117
R19_DSP: library part RES-SMD, JLCPart=C22775
R23_DAC_FILT R27_DAC_FILT: library part RES-SMD, JLCPart=C25897
RL0_DSP RL1_DSP RL2_DSP RL3_DSP RP1_POW: library part RES-SMD, JLCPart=C25130
S1_DSP S2_DSP S3_DSP: library part DIP-SW-3
S1_UC: library part TACT-SWITCH
TP1_POW TP2_POW TP3 TP4 TP5 TP6 TP7 TP8 TP9 TP10 TP11 TP12 TP13 TP14 TP15 TP16 TP17: library part TP-CLAW
U1_DAC_FILT: "Rail-To-Rail Amplifier 2 Circuit - 8-SOIC", JLCPart=C206212
U1_DSP: "SigmaDSP 28-/56-Bit Audio Processor with Two ADCs and Four DACs", JLCPart=C389590
U1_UC: JLCPart=C74524
Y1_DSP: library part "12.288MHz Crystal", JLCPart=C251589
FD1 FD2 FD3 FD4: ClassName=Fiducials
MH1 MH2 MH3 MH4: ClassName=MountHole
TH1 TH2 TH3: ClassName=Tooling

## Via types
v1: diameter 18, hole 10, Top Layer to Bottom Layer, tented both sides, 138 vias

## Nets (pads, with @x,y where several pads share a name; then routed paths per layer and width w, separated by ;. In a path a pad name is that pad's centre, name@x,y a point inside that pad or via, vN(x,y) a via of type N, cw(c..) or ccw(c..) an arc to the next point about the centre after c; other vN are vias at no path point)
+1V8: C1_DSP.1 C2_DSP.1 C3_DSP.1 Q1_DSP.C TP3.1 U1_DSP.13 U1_DSP.24 | length 1310.8
  Top Layer w8: C2_DSP.1 C2_DSP.1@2415.87,1585.87 ; U1_DSP.13@2415.87,1656.81 U1_DSP.13 ; U1_DSP.24 2633.27,1650.42 U1_DSP.24@2635.17,1648.51
  Top Layer w10: C2_DSP.1@2415.87,1585.87 U1_DSP.13@2415.87,1656.81 ; U1_DSP.24@2635.17,1648.51 2646.49,1648.51 2665,1630 C3_DSP.1
  Top Layer w15: C1_DSP.1 C2_DSP.1 ; C3_DSP.1 2665,1525 2725.98,1464.02 Q1_DSP.C@2725.98,1275
  Top Layer w30: C1_DSP.1 2415,1292.57 2432.57,1275 2474.02,1275 2725.98,1275 TP3.1
+3V3: C1_UC.2 C2_POW.2 C2_UC.2 C3_UC.2 C4_UC.2 C5_UC.2 C6_UC.2 C7_UC.2 C10_DSP.2 C11_DSP.2 C12_DSP.2 C13_DSP.2 C14_DSP.2 C15_DSP.2 C21_DSP.1 C27_DAC_FILT.2 D1_POW.1 D2_POW.2 P1_TC.1 P2_TC.1 P3_TC.1 Q1_DSP.E R1_DSP.2 R1_POW.2 R16_DSP.2 R17_DSP.2 R18_DSP.2 RP1_POW.1 TP1_POW.1 U1_DAC_FILT.8 U1_DSP.18 U1_DSP.34 U1_DSP.36 U1_DSP.39 U1_DSP.48 U1_POW.2 U1_UC.13 U1_UC.19 U1_UC.32 U1_UC.48 U1_UC.64 | length 2778.7
  Top Layer w8: C4_UC.2 980,3255 1000.02,3234.98 1002.36,3232.64 U1_UC.64 ; U1_UC.32 1297.64,2717.36 1320,2695 C2_UC.2 ; U1_UC.48 1407.64,3122.64 1430,3145 C3_UC.2 ; C13_DSP.2 2325,1985 2332.32,1992.32 U1_DSP.48 ; C15_DSP.2 C15_DSP.2@2515.08,1585.08 ; U1_DSP.18@2515.08,1657.6 U1_DSP.18 ; U1_DSP.34 U1_DSP.34@2692.87,1894.45 ; C12_DSP.2@2764.45,1894.45 C12_DSP.2 ; R18_DSP.2 2925,2140 2950,2115 C21_DSP.1
  Top Layer w10: C7_UC.2 880,2890 883.58,2886.42 U1_UC.13 ; C1_UC.2 1040,2705 1041.73,2706.73 U1_UC.19 ; C15_DSP.2@2515.08,1585.08 U1_DSP.18@2515.08,1657.6 ; U1_DSP.39 2593.9,1951.1 2610,1935 2625,1935 2640,1920 ; U1_DSP.34 2651.1,1893.9 2640,1905 2640,1920 ; U1_DSP.36 2653.27,1933.27 2640,1920 ; U1_DSP.34@2692.87,1894.45 C12_DSP.2@2764.45,1894.45
  Top Layer w15: C6_UC.2 C7_UC.2 ; C4_UC.2 950,3275 920,3305 C5_UC.2 920,3385 935,3400 1058.03,3400 1088.03,3370 R16_DSP.2 R17_DSP.2 ; C10_DSP.2 2270.85,2055 2285,2040.85 C13_DSP.2 ; R1_DSP.2 C14_DSP.2 C15_DSP.2 ; U1_DSP.36@2692.32,1934.99 2692.32,1982.32 2710,2000 C11_DSP.2 ; U1_DAC_FILT.8 3105,2695 3135,2725 C27_DAC_FILT.2
  Top Layer w30: D1_POW.1 375,3395 475,3295 U1_POW.2 R1_POW.2 C2_POW.2 475,2940 525,2890 D2_POW.2
  other v1: 2475,1115 2505,1130 2555,1430 2580,1445 2555,1460
+DC_IN: C1_POW.2 D1_POW.2 TP6.1 U1_POW.3 | length 573.3
  Top Layer w15: D1_POW.2 615,3395 635,3375 C1_POW.2
  Top Layer w30: U1_POW.3 D1_POW.2 TP6.1
ADC0: P1_TC.2 U1_UC.14 | length 3079
  Top Layer w8: U1_UC.14 979.03,2866.73 982.29,2870 v1(985,2870)
  MLT w8: v1(825,500) 825,2475 985,2635 v1(985,2870) ; P1_TC.2 v1(1050,500)
  MLB w8: v1(825,500) v1(1050,500)
ADC0_IN: J1.2R S2_DSP.1 S2_DSP.3 S2_DSP.5 TP9.1 | length 1616.1
  MLT w15: TP9.1 200,2006.85 J1.2R ; S2_DSP.5 S2_DSP.3 S2_DSP.1
  MLB w15: J1.2R 896.85,2121.85 925,2150 S2_DSP.3
ADC0_RES_4: R6_DSP.2 R7_DSP.2 R8_DSP.2 R9_DSP.2 R10_DSP.2 U1_DSP.2 | length 1374.5
  Top Layer w8: v1(2255,1930) 2300,1930 2316.42,1913.58 U1_DSP.2
  Top Layer w15: R9_DSP.2 R10_DSP.2 R8_DSP.2 ; R6_DSP.2 R7_DSP.2 R8_DSP.2 ; v1(1525,2150) R8_DSP.2
  MLT w15: v1(1525,1930) v1(1525,2150)
  MLB w15: v1(1525,1930) v1(2255,1930)
ADC1: P2_TC.2 U1_UC.15 | length 3878.5
  Top Layer w8: U1_UC.15 975,2847.05 977.05,2845 v1(1010,2845)
  MLT w8: v1(850,525) 850,2460 1010,2620 v1(1010,2845) ; P2_TC.2 v1(1875,525)
  MLB w8: v1(850,525) v1(1875,525)
ADC1_IN: J1.5T S3_DSP.1 S3_DSP.3 S3_DSP.5 TP10.1 | length 1859.2
  MLT w15: TP10.1 290,850 315,875 315,975 340,1000 ; J1.5T 315,1025 340,1000 ; v1(375,1000) 340,1000 ; S3_DSP.5 S3_DSP.3 S3_DSP.1
  MLB w15: v1(375,1000) S3_DSP.3
ADC1_RES_4: R11_DSP.2 R12_DSP.2 R13_DSP.2 R14_DSP.2 R15_DSP.2 U1_DSP.4 | length 2019.4
  Top Layer w8: v1(2280,1870) 2300,1870 2304.21,1874.21 U1_DSP.4
  Top Layer w15: R14_DSP.2 R15_DSP.2 R13_DSP.2 ; R11_DSP.2 R12_DSP.2 R13_DSP.2 ; v1(1575,1000) R13_DSP.2
  MLT w15: v1(1575,1000) v1(1575,1870)
  MLB w15: v1(1575,1870) v1(2280,1870)
ADC2: P3_TC.2 U1_UC.16 | length 4605.7
  Top Layer w8: U1_UC.16 977.64,2827.36 985,2820 v1(1035,2820)
  MLT w8: v1(875,550) 875,2440 1035,2600 v1(1035,2820) ; P3_TC.2 v1(2625,550)
  MLB w8: v1(875,550) v1(2625,550)
ADC3: U1_UC.17
ADC4: U1_UC.20
ADC5: U1_UC.21
ADC6: U1_UC.22
ADC7: U1_UC.23
ADC8: U1_UC.26
ADC9: U1_UC.27
ADC10: U1_UC.8
ADC11: U1_UC.9
ADC_RES_4: R2_DSP.2 R3_DSP.2 R4_DSP.2 R5_DSP.2 U1_DSP.3 | length 1408.5
  Top Layer w8: v1(2265,1900) 2305,1900 2311.1,1893.9 U1_DSP.3
  Top Layer w15: R5_DSP.2 R4_DSP.2 1477.34,1547.34 1477.34,1566.79 1486.13,1575.57 ; R2_DSP.2 R3_DSP.2 1477.34,1602.66 1477.34,1584.36 1486.13,1575.57 ; v1(1535,1575) 1534.43,1575.57 1486.13,1575.57
  MLT w15: v1(1535,1575) v1(1535,1900)
  MLB w15: v1(1535,1900) v1(2265,1900)
DAC2_OUT: R21_DAC_FILT.1 TP16.1 U1_DSP.44 | length 2294.9
  Top Layer w8: v1(2480,2055) 2495.47,2039.53 U1_DSP.44
  Top Layer w15: v1(2945,3115) R21_DAC_FILT.1
  MLT w15: v1(2480,2055) v1(2480,3115) ; TP16.1 2945,3500 v1(2945,3115)
  MLB w15: v1(2480,3115) v1(2945,3115)
DAC3_OUT: R25_DAC_FILT.1 TP17.1 U1_DSP.43 | length 2577.7
  Top Layer w8: v1(2515,2060) 2515.08,2059.92 2515.08,1992.4 U1_DSP.43
  Top Layer w15: v1(2935,2445) R25_DAC_FILT.1
  MLT w15: v1(2515,2060) v1(2515,2445) ; v1(3350,2445) TP17.1
  MLB w15: v1(2515,2445) v1(2935,2445) v1(3350,2445)
GND: C1_DSP.2 C1_POW.1 C1_UC.1 C2_DSP.2 C2_POW.1 C2_UC.1 C3_DSP.2 C3_UC.1 C4_UC.1 C5_UC.1 C6_UC.1 C7_UC.1 C8_UC.1 C9_UC.1 C10_DSP.1 C11_DSP.1 C12_DSP.1 C13_DSP.1 C14_DSP.1 C15_DSP.1 C16_DSP.1 C17_DSP.2 C18_DSP.1 C19_DSP.2 C20_DSP.2 C22_DSP.2 C25_DSP.1 C26_DSP.1 C27_DAC_FILT.1 C28_DAC_FILT.1 C30_DAC_FILT.2 C32_DAC_FILT.1 C34_DAC_FILT.2 CADJ_POW.1 DL0_DSP.2 DL1_DSP.2 DL2_DSP.2 DL3_DSP.2 DP1_POW.2 J1.1S J2.4 J3.1S P1_TC.3 P2_TC.3 P3_TC.3 R2_POW.1 R23_DAC_FILT.1 R27_DAC_FILT.1 S1_DSP.1 S1_DSP.3 S1_DSP.5 S1_UC.1 S1_UC.2 TP2_POW.1 TP4.1 TP8.1 TP11.1 TP14.1 TP15.1 U1_DAC_FILT.4 U1_DSP.1 U1_DSP.6 U1_DSP.7 U1_DSP.12 U1_DSP.20 U1_DSP.25 U1_DSP.30 U1_DSP.33 U1_DSP.37 U1_DSP.38 U1_DSP.42 U1_UC.12 U1_UC.18 U1_UC.31 U1_UC.47 U1_UC.63 | length 65.8
  Top Layer w8: v1(2645,1850) 2646.91,1851.91 2646.91,1866.39
  Top Layer w10: 2646.91,1866.39 2654.73,1874.21 U1_DSP.33
  other v1: 2660,1370 2690,1370 2690,1400 2690,1430 2260,1500 2260,1530 2340,1570 2590,1570 2340,1600 2590,1600 2645,1715 2405,1725 2645,1780 2405,1785 3065,1815 3095,1815 2405,1865 2840,1895 2840,1925 2435,1945 2505,1945 2115,2040 2325,2050 2640,2050 2115,2070 2325,2080 2640,2080 2285,2185 2315,2185 2420,2205 2450,2205 2555,2295 2555,2325 2670,2340 2700,2340 3180,2400 3210,2400 3240,2400 3270,2400 1335,2590 2845,2590 1335,2620 2845,2620 950,2660 950,2690 1105,2695 1135,2695 1165,2695 3120,2860 3150,2860 2885,2890 2885,2920 350,2925 375,2925 850,2970 2895,2980 130,2995 2895,3010 130,3040 765,3045 795,3045 130,3085 1490,3090 1490,3115 3230,3200 3260,3200 3290,3200 3320,3200 1055,3260 1055,3290 640,3455 670,3455 2585,3465 2610,3465
I2C1_SCL: R17_DSP.1 U1_DSP.23 U1_UC.58 | length 3239.3
  Top Layer w8: U1_DSP.23 2613.58,1698.58 2615,1700 v1(2615,1735)
  Top Layer w10: U1_UC.58 1120.47,3240.47 1125,3245 v1(1125,3265) 1125,3290 1143.16,3308.16 1143.16,3324.16 1149,3330 R17_DSP.1
  MLT w8: v1(1125,2950) v1(1125,3265) ; v1(2615,1735) v1(2615,2950)
  MLB w8: v1(1125,2950) v1(2615,2950)
I2C1_SDA: R16_DSP.1 U1_DSP.22 U1_UC.59 | length 3237
  Top Layer w8: v1(2590,1710) 2590,1695 2593.9,1691.1 U1_DSP.22
  Top Layer w10: R16_DSP.1 1090,3300 1095,3295 v1(1095,3265) 1095,3245 1100.79,3239.21 U1_UC.59
  MLT w8: v1(1095,2925) v1(1095,3265) ; v1(2590,1710) v1(2590,2925)
  MLB w8: v1(1095,2925) v1(2590,2925)
I2C2_SCL: U1_UC.29
I2C2_SDA: U1_UC.55
I2C3_SCL: U1_UC.41
I2C3_SDA: U1_UC.40
LED0_4: RL0_DSP.2 U1_DSP.8 | length 1496.6
  Top Layer w8: v1(2225,1805) 2310,1805 2319.53,1795.47 U1_DSP.8
  Top Layer w15: RL0_DSP.2 v1(1700,1010)
  MLT w10: v1(1700,1010) v1(1700,1805)
  MLB w10: v1(1700,1805) v1(2225,1805)
LED1_4: RL1_DSP.2 U1_DSP.9 | length 1269.4
  Top Layer w8: v1(2250,1780) 2305,1780 2309.21,1775.79 U1_DSP.9
  Top Layer w15: RL1_DSP.2 v1(1900,1010)
  MLT w10: v1(1900,1010) v1(1900,1780)
  MLB w10: v1(1900,1780) v1(2250,1780)
LED2_4: RL2_DSP.2 U1_DSP.10 | length 1043.1
  Top Layer w8: v1(2275,1755) 2310,1755 2311.1,1756.1 U1_DSP.10
  Top Layer w15: RL2_DSP.2 v1(2100,1010)
  MLT w10: v1(2100,1010) v1(2100,1755)
  MLB w10: v1(2100,1755) v1(2275,1755)
LED3_4: RL3_DSP.2 U1_DSP.11 | length 820.3
  Top Layer w8: v1(2300,1730) 2320,1730 2324.64,1734.64 2355.9,1734.64 U1_DSP.11
  Top Layer w15: RL3_DSP.2 v1(2300,1010)
  MLT w10: v1(2300,1010) v1(2300,1730)
NetC8_UC_2: C8_UC.2 U1_UC.30 | length 176
  Top Layer w10: C8_UC.2 1183.97,2608.97 1183.97,2633.97 1258.27,2708.27 U1_UC.30
NetC16_DSP_2: C16_DSP.2 C18_DSP.2 U1_DSP.47 | length 169.5
  Top Layer w10: C16_DSP.2 C18_DSP.2 2420,2065 2436.42,2048.58 U1_DSP.47
NetC17_DSP_1: C17_DSP.1 C19_DSP.1 U1_DSP.41 | length 229.9
  Top Layer w10: C17_DSP.1 2540,2090 2554.53,2075.47 U1_DSP.41
  Top Layer w15: C19_DSP.1 2495,2125 2510,2140 C17_DSP.1
NetC20_DSP_1: C20_DSP.1 C22_DSP.1 U1_DSP.40 | length 230.8
  Top Layer w10: U1_DSP.40 2574.21,2059.21 2610,2095 C22_DSP.1 ; C20_DSP.1@2665,2125 C20_DSP.1
  Top Layer w15: C22_DSP.1 C20_DSP.1@2665,2125
NetC21_DSP_2: C21_DSP.2 C23_DSP.2 C24_DSP.2 U1_DSP.35 | length 326.8
  Top Layer w10: U1_DSP.35 2728.58,1913.58 2815,2000 C23_DSP.2
  Top Layer w15: C23_DSP.2 C24_DSP.2 2910,2025 2930,2045 C21_DSP.2
NetC23_DSP_1: C23_DSP.1 C24_DSP.1 R18_DSP.1 | length 140
  Top Layer w15: C23_DSP.1 C24_DSP.1 R18_DSP.1
NetC25_DSP_2: C25_DSP.2 U1_DSP.32 Y1_DSP.1 | length 402.4
  Top Layer w8: Y1_DSP.1 Y1_DSP.1@2977.17,1890
  Top Layer w10: U1_DSP.32 2734.53,1854.53 2745,1865 2952.17,1865 Y1_DSP.1
  Top Layer w15: Y1_DSP.1@2977.17,1890 C25_DSP.2
NetC26_DSP_2: C26_DSP.2 R19_DSP.2 Y1_DSP.2 | length 246.9
  Top Layer w8: Y1_DSP.2 Y1_DSP.2@2977.17,1740
  Top Layer w10: R19_DSP.2 2863.94,1805 2898.31,1770.63 2946.54,1770.63 Y1_DSP.2
  Top Layer w15: Y1_DSP.2@2977.17,1740 C26_DSP.2
NetC28_DAC_FILT_2: C28_DAC_FILT.2 R22_DAC_FILT.2 U1_DAC_FILT.3 | length 154.1
  Top Layer w15: U1_DAC_FILT.3 C28_DAC_FILT.2 2976.36,2996.36 2976.36,3016.36 2985,3025 R22_DAC_FILT.2
NetC29_DAC_FILT_1: C29_DAC_FILT.1 R20_DAC_FILT.1 | length 94.7
  Top Layer w15: C29_DAC_FILT.1 3110,3200 3135,3200 3142.81,3192.19 3171.75,3192.19 3180,3183.94 R20_DAC_FILT.1
NetC29_DAC_FILT_2: C29_DAC_FILT.2 C31_DAC_FILT.1 U1_DAC_FILT.1 U1_DAC_FILT.2 | length 225.4
  Top Layer w15: U1_DAC_FILT.2 U1_DAC_FILT.1 C31_DAC_FILT.1 3075,3025 3081.91,3031.91 3081.91,3051.91 C29_DAC_FILT.2
NetC31_DAC_FILT_2: C31_DAC_FILT.2 R21_DAC_FILT.2 R22_DAC_FILT.1 | length 124.1
  Top Layer w15: R21_DAC_FILT.2 R22_DAC_FILT.1 3025,3025 3033.64,3016.36 3033.64,2996.36 C31_DAC_FILT.2
NetC32_DAC_FILT_2: C32_DAC_FILT.2 R26_DAC_FILT.2 U1_DAC_FILT.5 | length 154.1
  Top Layer w15: U1_DAC_FILT.5 C32_DAC_FILT.2 2925,2575 2932.66,2567.34 2932.66,2547.34 R26_DAC_FILT.2
NetC33_DAC_FILT_1: C33_DAC_FILT.1 R24_DAC_FILT.1 | length 93.5
  Top Layer w15: C33_DAC_FILT.1 3068.09,2408.09 3098.09,2408.09 3100,2410 3121.75,2410 3130,2418.25 R24_DAC_FILT.1
NetC33_DAC_FILT_2: C33_DAC_FILT.2 C35_DAC_FILT.1 U1_DAC_FILT.6 U1_DAC_FILT.7 | length 225.4
  Top Layer w15: U1_DAC_FILT.6 U1_DAC_FILT.7 C35_DAC_FILT.1 3026.36,2603.64 3026.36,2578.64 3035,2570 3035,2545 C33_DAC_FILT.2
NetC35_DAC_FILT_2: C35_DAC_FILT.2 R25_DAC_FILT.2 R26_DAC_FILT.1 | length 124.1
  Top Layer w15: R25_DAC_FILT.2 R26_DAC_FILT.1 2975,2575 2983.64,2583.64 2983.64,2603.64 C35_DAC_FILT.2
NetCADJ_POW_2: CADJ_POW.2 D2_POW.1 R1_POW.1 R2_POW.2 U1_POW.1 | length 490.7
  Top Layer w30: D2_POW.1 235,2890 285,2940 CADJ_POW.2 R2_POW.2 R1_POW.1 U1_POW.1
NetDL0_DSP_1: DL0_DSP.1 RL0_DSP.1 | length 82
  Top Layer w15: DL0_DSP.1 RL0_DSP.1
NetDL1_DSP_1: DL1_DSP.1 RL1_DSP.1 | length 82
  Top Layer w15: DL1_DSP.1 RL1_DSP.1
NetDL2_DSP_1: DL2_DSP.1 RL2_DSP.1 | length 82
  Top Layer w15: DL2_DSP.1 RL2_DSP.1
NetDL3_DSP_1: DL3_DSP.1 RL3_DSP.1 | length 82
  Top Layer w15: DL3_DSP.1 RL3_DSP.1
NetDP1_POW_1: DP1_POW.1 RP1_POW.2 | length 77
  Top Layer w15: DP1_POW.1 RP1_POW.2
NetQ1_DSP_B: Q1_DSP.B R1_DSP.1 U1_DSP.17 | length 301
  Top Layer w8: Q1_DSP.B 2475,1366.54 R1_DSP.1 2475,1595 2495.47,1615.47 U1_DSP.17
NetR2_DSP_1: R2_DSP.1 S1_DSP.2 | length 135
  Top Layer w15: S1_DSP.2 R2_DSP.1
NetR3_DSP_1: R3_DSP.1 R4_DSP.1 S1_DSP.4 | length 234.9
  Top Layer w15: S1_DSP.4 1360,1575 ; R4_DSP.1 1390,1545 1360,1575 ; R3_DSP.1 1390,1605 1360,1575
NetR5_DSP_1: R5_DSP.1 S1_DSP.6 | length 95
  Top Layer w15: S1_DSP.6 R5_DSP.1
NetR6_DSP_1: R6_DSP.1 R7_DSP.1 S2_DSP.2 | length 234.9
  Top Layer w15: S2_DSP.2 1360,2250 ; R7_DSP.1 1390,2220 1360,2250 ; R6_DSP.1 1390,2280 1360,2250
NetR8_DSP_1: R8_DSP.1 S2_DSP.4 | length 95
  Top Layer w15: S2_DSP.4 R8_DSP.1
NetR9_DSP_1: R9_DSP.1 R10_DSP.1 S2_DSP.6 | length 186.6
  Top Layer w15: S2_DSP.6 1385,2050 ; R9_DSP.1 1395,2040 1385,2050 ; R10_DSP.1 1415,2080 1385,2050
NetR11_DSP_1: R11_DSP.1 R12_DSP.1 S3_DSP.2 | length 234.9
  Top Layer w15: S3_DSP.2 1360,1100 ; R12_DSP.1 1390,1070 1360,1100 ; R11_DSP.1 1390,1130 1360,1100
NetR13_DSP_1: R13_DSP.1 S3_DSP.4 | length 95
  Top Layer w15: S3_DSP.4 R13_DSP.1
NetR14_DSP_1: R14_DSP.1 R15_DSP.1 S3_DSP.6 | length 186.6
  Top Layer w15: S3_DSP.6 1385,900 ; R14_DSP.1 1395,890 1385,900 ; R15_DSP.1 1415,930 1385,900
NetR19_DSP_1: R19_DSP.1 U1_DSP.31 | length 100.1
  Top Layer w8: U1_DSP.31 U1_DSP.31@2692.4,1834.92
  Top Layer w10: U1_DSP.31 2735.16,1834.84 2755,1815 2770,1815 R19_DSP.1
NetTP5_1: TP5.1 TP7.1 | length 300
  Top Layer w30: TP7.1 TP5.1
nRESET: U1_DSP.5 U1_UC.62 | length 2685.8
  Top Layer w8: v1(1040,3145) 1040,3160 1041.73,3161.73 U1_UC.62 ; v1(2220,1840) 2290,1840 2304.53,1854.53 U1_DSP.5
  MLT w8: v1(1040,2900) v1(1040,3145) ; v1(2220,1840) v1(2220,2900)
  MLB w8: v1(1040,2900) v1(2220,2900)
nRST: C9_UC.2 J2.1 S1_UC.3 S1_UC.4 U1_UC.7 | length 2628.6
  Top Layer w8: v1(870,3005) 870.24,3004.76 923.39,3004.76 U1_UC.7
  Top Layer w15: S1_UC.4 2572.05,3652.95 2600,3625 C9_UC.2
  MLT w8: J2.1 2175,3575 2200,3550 ; v1(2200,3005) 2200,3550 ; S1_UC.3 2336.42,3601.42 2310,3575 2225,3575 2200,3550
  MLB w8: v1(870,3005) v1(2200,3005) ; S1_UC.3 S1_UC.4
OUT1: C30_DAC_FILT.1 J3.2R R20_DAC_FILT.2 R23_DAC_FILT.2 TP12.1 | length 1535.1
  Top Layer w15: R20_DAC_FILT.2 3180,3103.94 3188.25,3112.19 3212.19,3112.19 3220,3120 C30_DAC_FILT.1 ; v1(3245,3080) C30_DAC_FILT.1 ; R23_DAC_FILT.2 C30_DAC_FILT.1
  MLT w15: J3.2R 3620,2155 TP12.1
  MLB w15: v1(3245,3080) 3396.85,2928.15 J3.2R
OUT2: C34_DAC_FILT.1 J3.5T R24_DAC_FILT.2 R27_DAC_FILT.2 TP13.1 | length 2116.7
  Top Layer w15: R24_DAC_FILT.2 3130,2496.06 3138.25,2487.81 3162.19,2487.81 3170,2480 C34_DAC_FILT.1 ; v1(3195,2520) C34_DAC_FILT.1 ; R27_DAC_FILT.2 C34_DAC_FILT.1
  MLT w15: v1(3195,2520) v1(3195,3320) ; J3.5T 3725,3216.85 TP13.1
  MLB w15: v1(3195,3320) 3195.57,3320.57 3618.72,3320.57 J3.5T
SWCLK: J2.6 U1_UC.49 | length 849.6
  Top Layer w10: U1_UC.49 1297.64,3237.64 1300,3240 v1(1300,3255)
  MLT w8: v1(1875,3255) J2.6
  MLB w8: v1(1300,3255) v1(1875,3255)
SWDIO: J2.2 U1_UC.46 | length 1116.2
  Top Layer w8: U1_UC.46 1411.73,3083.27 v1(1430,3065)
  MLT w8: v1(2075,3065) J2.2
  MLB w8: v1(1430,3065) v1(2075,3065)
pads on no net: FD1. FD2. FD3. FD4. J1. J2.3 J2.5 J2.7 J2.8 J3. MH1.1 MH2.1 MH3.1 MH4.1 TH1. TH2. TH3. U1_DSP.14 U1_DSP.15 U1_DSP.16 U1_DSP.19 U1_DSP.21 U1_DSP.26 U1_DSP.27 U1_DSP.28 U1_DSP.29 U1_DSP.45 U1_DSP.46 U1_UC.1 U1_UC.2 U1_UC.3 U1_UC.4 U1_UC.5 U1_UC.6 U1_UC.10 U1_UC.11 U1_UC.24 U1_UC.25 U1_UC.28 U1_UC.33 U1_UC.34 U1_UC.35 U1_UC.36 U1_UC.37 U1_UC.38 U1_UC.39 U1_UC.42 U1_UC.43 U1_UC.44 U1_UC.45 U1_UC.50 U1_UC.51 U1_UC.52 U1_UC.53 U1_UC.54 U1_UC.56 U1_UC.57 U1_UC.60 U1_UC.61

## Polygon pours and split planes (outlines as drawn)
GND on Top Layer "DGND-VCC" (solid, remove dead copper, pour order 11): 2625,2745 1700,2745 1430,2475 0,2475 0,3695 cw(c240,3695) 240,3935 2625,3935
+3V3 on Top Layer "+3V3-T" (solid, remove dead copper, pour order 0): 1310,2700 1290,2720 1290,2775 1400,2775 1425,2800 1425,2975 1525,3075 1525,3115 1505,3135 1420,3135 1407.64,3122.64 1350,3122.64 1350,3200 1875,3200 2285,2790 3150,2790 3150,2710 3100,2660 3060,2660 3060,2725 3035,2750 2900,2750 2800,2650 2800,2525 2900,2425 2985,2425 2985,2075 2935,2075 2935,2115 2915,2135 2915,2210 2860,2210 2780,2130 2780,2010 2720,1950 2720,1925 2665,1925 2665,2015 2700,2050 2700,2080 2730,2110 2730,2350 2615,2465 2495,2465 2255,2225 2255,2110 2270,2095 2295,2095 2295,2045 2320,2020 2425,2020 2425,1965 2275,1965 2275,2000 2245,2030 2245,2075 2225,2095 2100,2095 2080,2075 2080,1530 2400,1210 2525,1210 2525,1100 2075,1100 1925,1250 1925,1925 1635,2215 1550,2300 725,2300 675,2250 675,375 725,325 2375,325 2480,220 2480,100 2375,100 2375,175 2350,200 1755,200 1730,175 1730,100 1625,100 1625,175 1600,200 930,200 905,175 905,100 800,100 800,175 775,200 625,200 525,300 525,2250 475,2300 0,2300 0,2500 275,2500 450,2675 450,3210 500,3210 500,3175 550,3125 625,3125 925,3425 1120,3425 1165,3380 1165,3360 1070,3360 1045,3385 965,3385 945,3365 945,3325 980,3290 990,3290 990,3260 1002.36,3247.64 1002.36,3175 850,3175 725,3050 725,2950 760,2915 805,2915 815,2905 865,2905 865,2700 930,2635 1005,2635 1030,2660 1030,2690 1075,2690 1075,2605 1130,2550 1375,2550 1375,2625 1340,2660 1310,2660 1310,2690
NetC8_UC_2 on Top Layer "NETC8_UC_2_L01_P009" (solid, remove dead copper, pour order 9): 1160,2590 1160,2650 1195,2685 1245,2685 1200,2640 1200,2590
GND on Top Layer "DGND-DSP" (solid, remove dead copper, pour order 10): 1625,685 1735,575 3135,575 3250,690 3250,2240 2965,2525 2815,2525 2725,2615 1955,2615 1625,2285
GND on Top Layer "AGND-T" (solid, pour order 16): 3275,2250 2975,2550 2825,2550 2650,2725 2650,3935 3695,3935 cw(c3695,3695) 3935,3695 3935,2231.45 3935,523.31 3935,240 cw(c3695,240) 3695,0 240,0 cw(c240,240) 0,240 0,2325 1500,2325 1600,2225 1600,675 1725,550 3150,550 3275,675
+1V8 on Top Layer "+1V8" (solid, remove dead copper, pour order 4): 2440,1300 2440,1250 2525,1250 2570,1205 2760,1205 2760,1345 2570,1345 2525,1300
+3V3 on Top Layer "+3V3_DSP" (solid, remove dead copper, pour order 2): 2505,1625 2525,1625 2525,1570 2540,1555 2540,1510 2595,1455 2595,1415 2505,1415 2505,1475 2490,1490 2490,1590 2505,1605 2505,1620
GND on Bottom Layer "DGND" (solid, remove dead copper, pour order 7): 1735,575 3135,575 3250,690 3250,2240 2965,2525 2815,2525 2625,2715 2625,3935 240,3935 ccw(c240,3695) 0,3695 0,2620 570,2620 815,2375 1485,2375 1625,2235 1625,685
GND on Bottom Layer "AGND" (solid, remove dead copper, pour order 5): 800,2350 575,2575 575,3125 0,3125 0,2340.82 0,350 0,240 ccw(c240,240) 240,0 3289.24,0 3695,0 ccw(c3695,240) 3935,240 3935,3695 ccw(c3695,3695) 3695,3935 2650,3935 2650,2725 2825,2550 2975,2550 3275,2250 3275,675 3150,550 1725,550 1600,675 1600,2225 1475,2350
+3V3 on Bottom Layer "+3V3" (solid, remove dead copper, pour order 3): 2575,1100 2595,1120 2595,1455 2575,1475 2435,1475 2425,1465 2425,1120 2445,1100
GND on MLB "DGND" (solid, remove dead copper, pour order 12): 1735,575 3135,575 3250,690 3250,2240 2965,2525 2815,2525 2625,2715 2625,3935 240,3935 ccw(c240,3695) 0,3695 0,2620 570,2620 815,2375 1485,2375 1625,2235 1625,685
GND on MLB "AGND" (solid, remove dead copper, pour order 13): 800,2350 575,2575 575,3125 0,3125 0,2340.82 0,350 0,240 ccw(c240,240) 240,0 3289.24,0 3695,0 ccw(c3695,240) 3935,240 3935,3695 ccw(c3695,3695) 3695,3935 2650,3935 2650,2725 2825,2550 2975,2550 3275,2250 3275,675 3150,550 1725,550 1600,675 1600,2225 1475,2350
GND on MLT "DGND" (solid, remove dead copper, pour order 14): 1735,575 3135,575 3250,690 3250,2240 2965,2525 2815,2525 2625,2715 2625,3935 240,3935 ccw(c240,3695) 0,3695 0,2620 570,2620 815,2375 1485,2375 1625,2235 1625,685
GND on MLT "AGND" (solid, remove dead copper, pour order 15): 800,2350 575,2575 575,3125 0,3125 0,2340.82 0,350 0,240 ccw(c240,240) 240,0 3289.24,0 3695,0 ccw(c3695,240) 3935,240 3935,3695 ccw(c3695,3695) 3695,3935 2650,3935 2650,2725 2825,2550 2975,2550 3275,2250 3275,675 3150,550 1725,550 1600,675 1600,2225 1475,2350

## Keep-outs
Keep-Out Layer:
  the board outline again, w40

## Silkscreen, mask and mechanical layers (free items; w line width, h text height)
Top Overlay:
  lines w10: 1075,3695 1075,3595 1575,3595 1575,3695
  text "DAC_L" at 2890,3855 h60 r180
  text "DAC_R" at 3490,3855 h60 r180
  text "nRST" at 2105,3660 h60 r90
  text "GND" at 2005,3230 h60 r90
  text "SWDIO" at 2105,3120 h60 r90
  text "SWCLK" at 1905,3110 h60 r90
  text "OUT" at 3445,3045 h60 r90
  text "+3V3" at 1515,2520 h60
  text "48KHz" at 650,2220 h60
  text "96KHz" at 650,2125 h60
  text "192KHz" at 605,2020 h60
  text "IN" at 505,1970 h60 r270
  text "48KHz" at 655,1645 h60
  text "96KHz" at 655,1545 h60
  text "192KHz" at 605,1445 h60
  text "48KHz" at 655,1070 h60
  text "96KHz" at 655,970 h60
  text "192KHz" at 605,870 h60
  text "L0" at 1650,615 h60
  text "L1" at 1850,615 h60
  text "L2" at 2050,615 h60
  text "L3" at 2250,615 h60
Board Outline:
  the board outline again, w10